# Altium PCB Nucleo_Dory_QFN68.PcbDoc (part 1 of 3)
Units mm, origin at the board's own origin, x right, y up, seen from the top; angles counter-clockwise.
Board outline 70.13 x 64.58 mm, 4 copper layers (L1, L2, L3, L4), stack 1.565 mm thick; 212 components, 161 nets, 1280 pads, 261 vias.
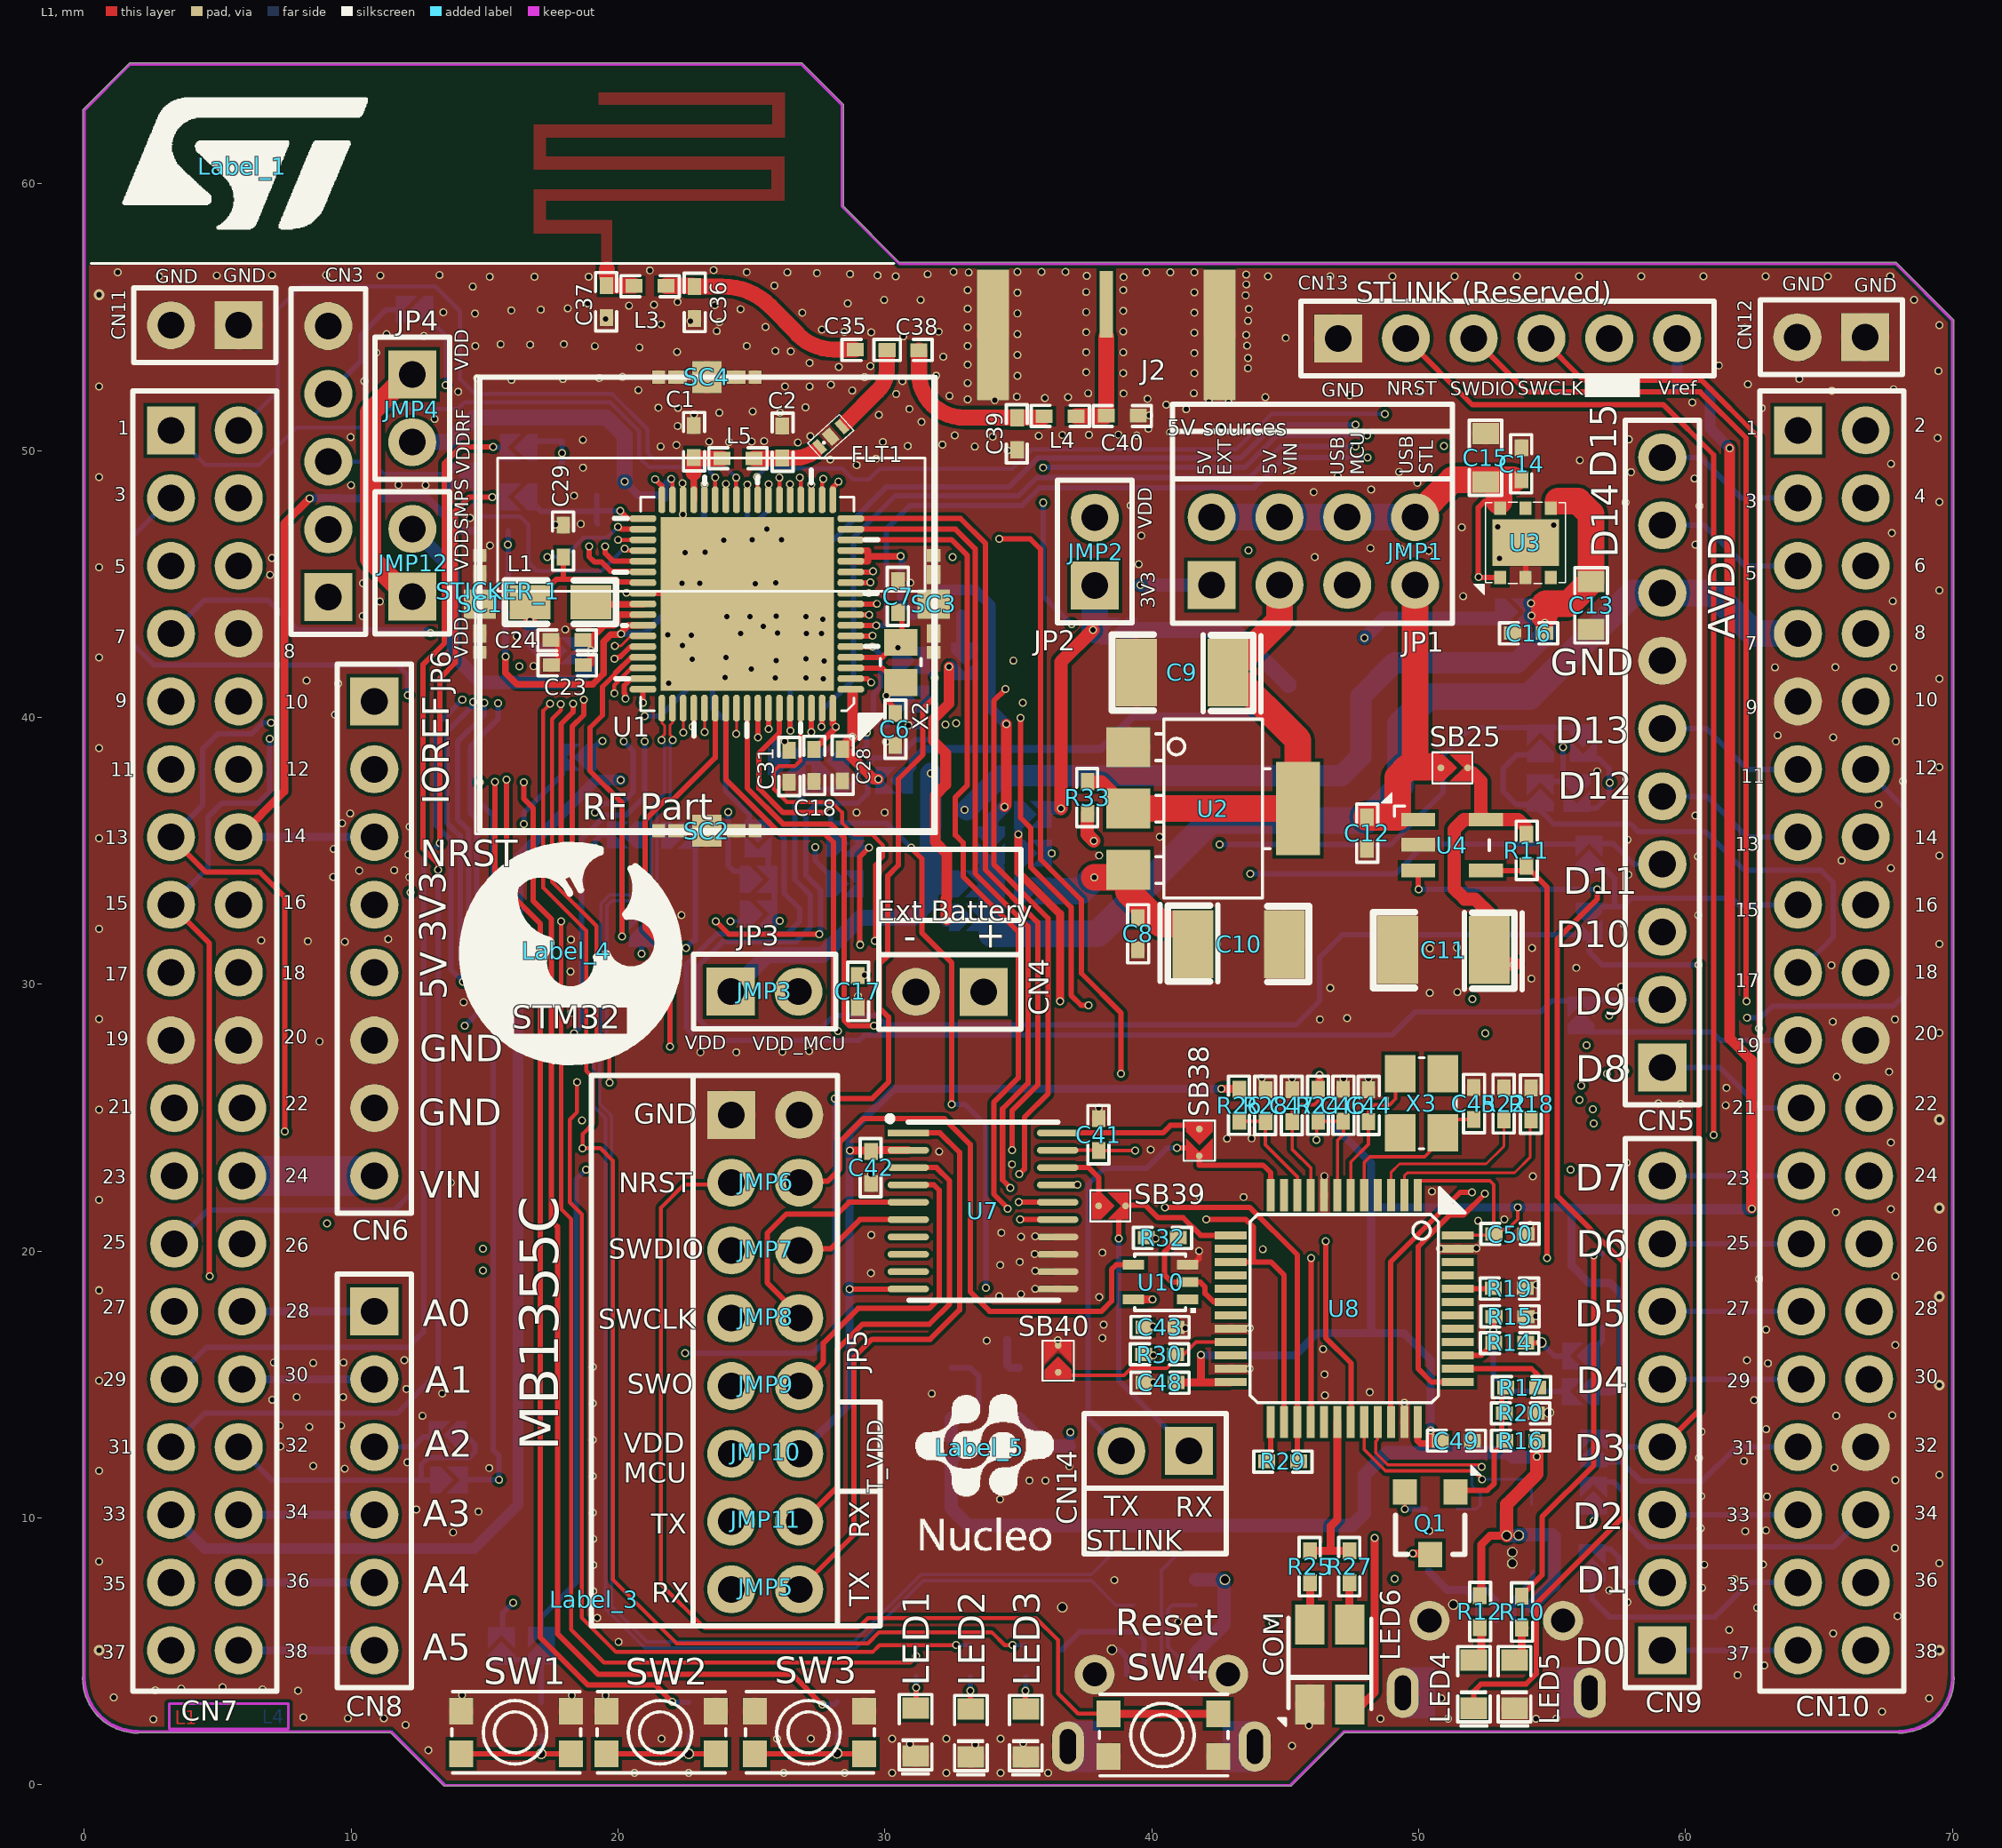
[diagram p0: L1 view]
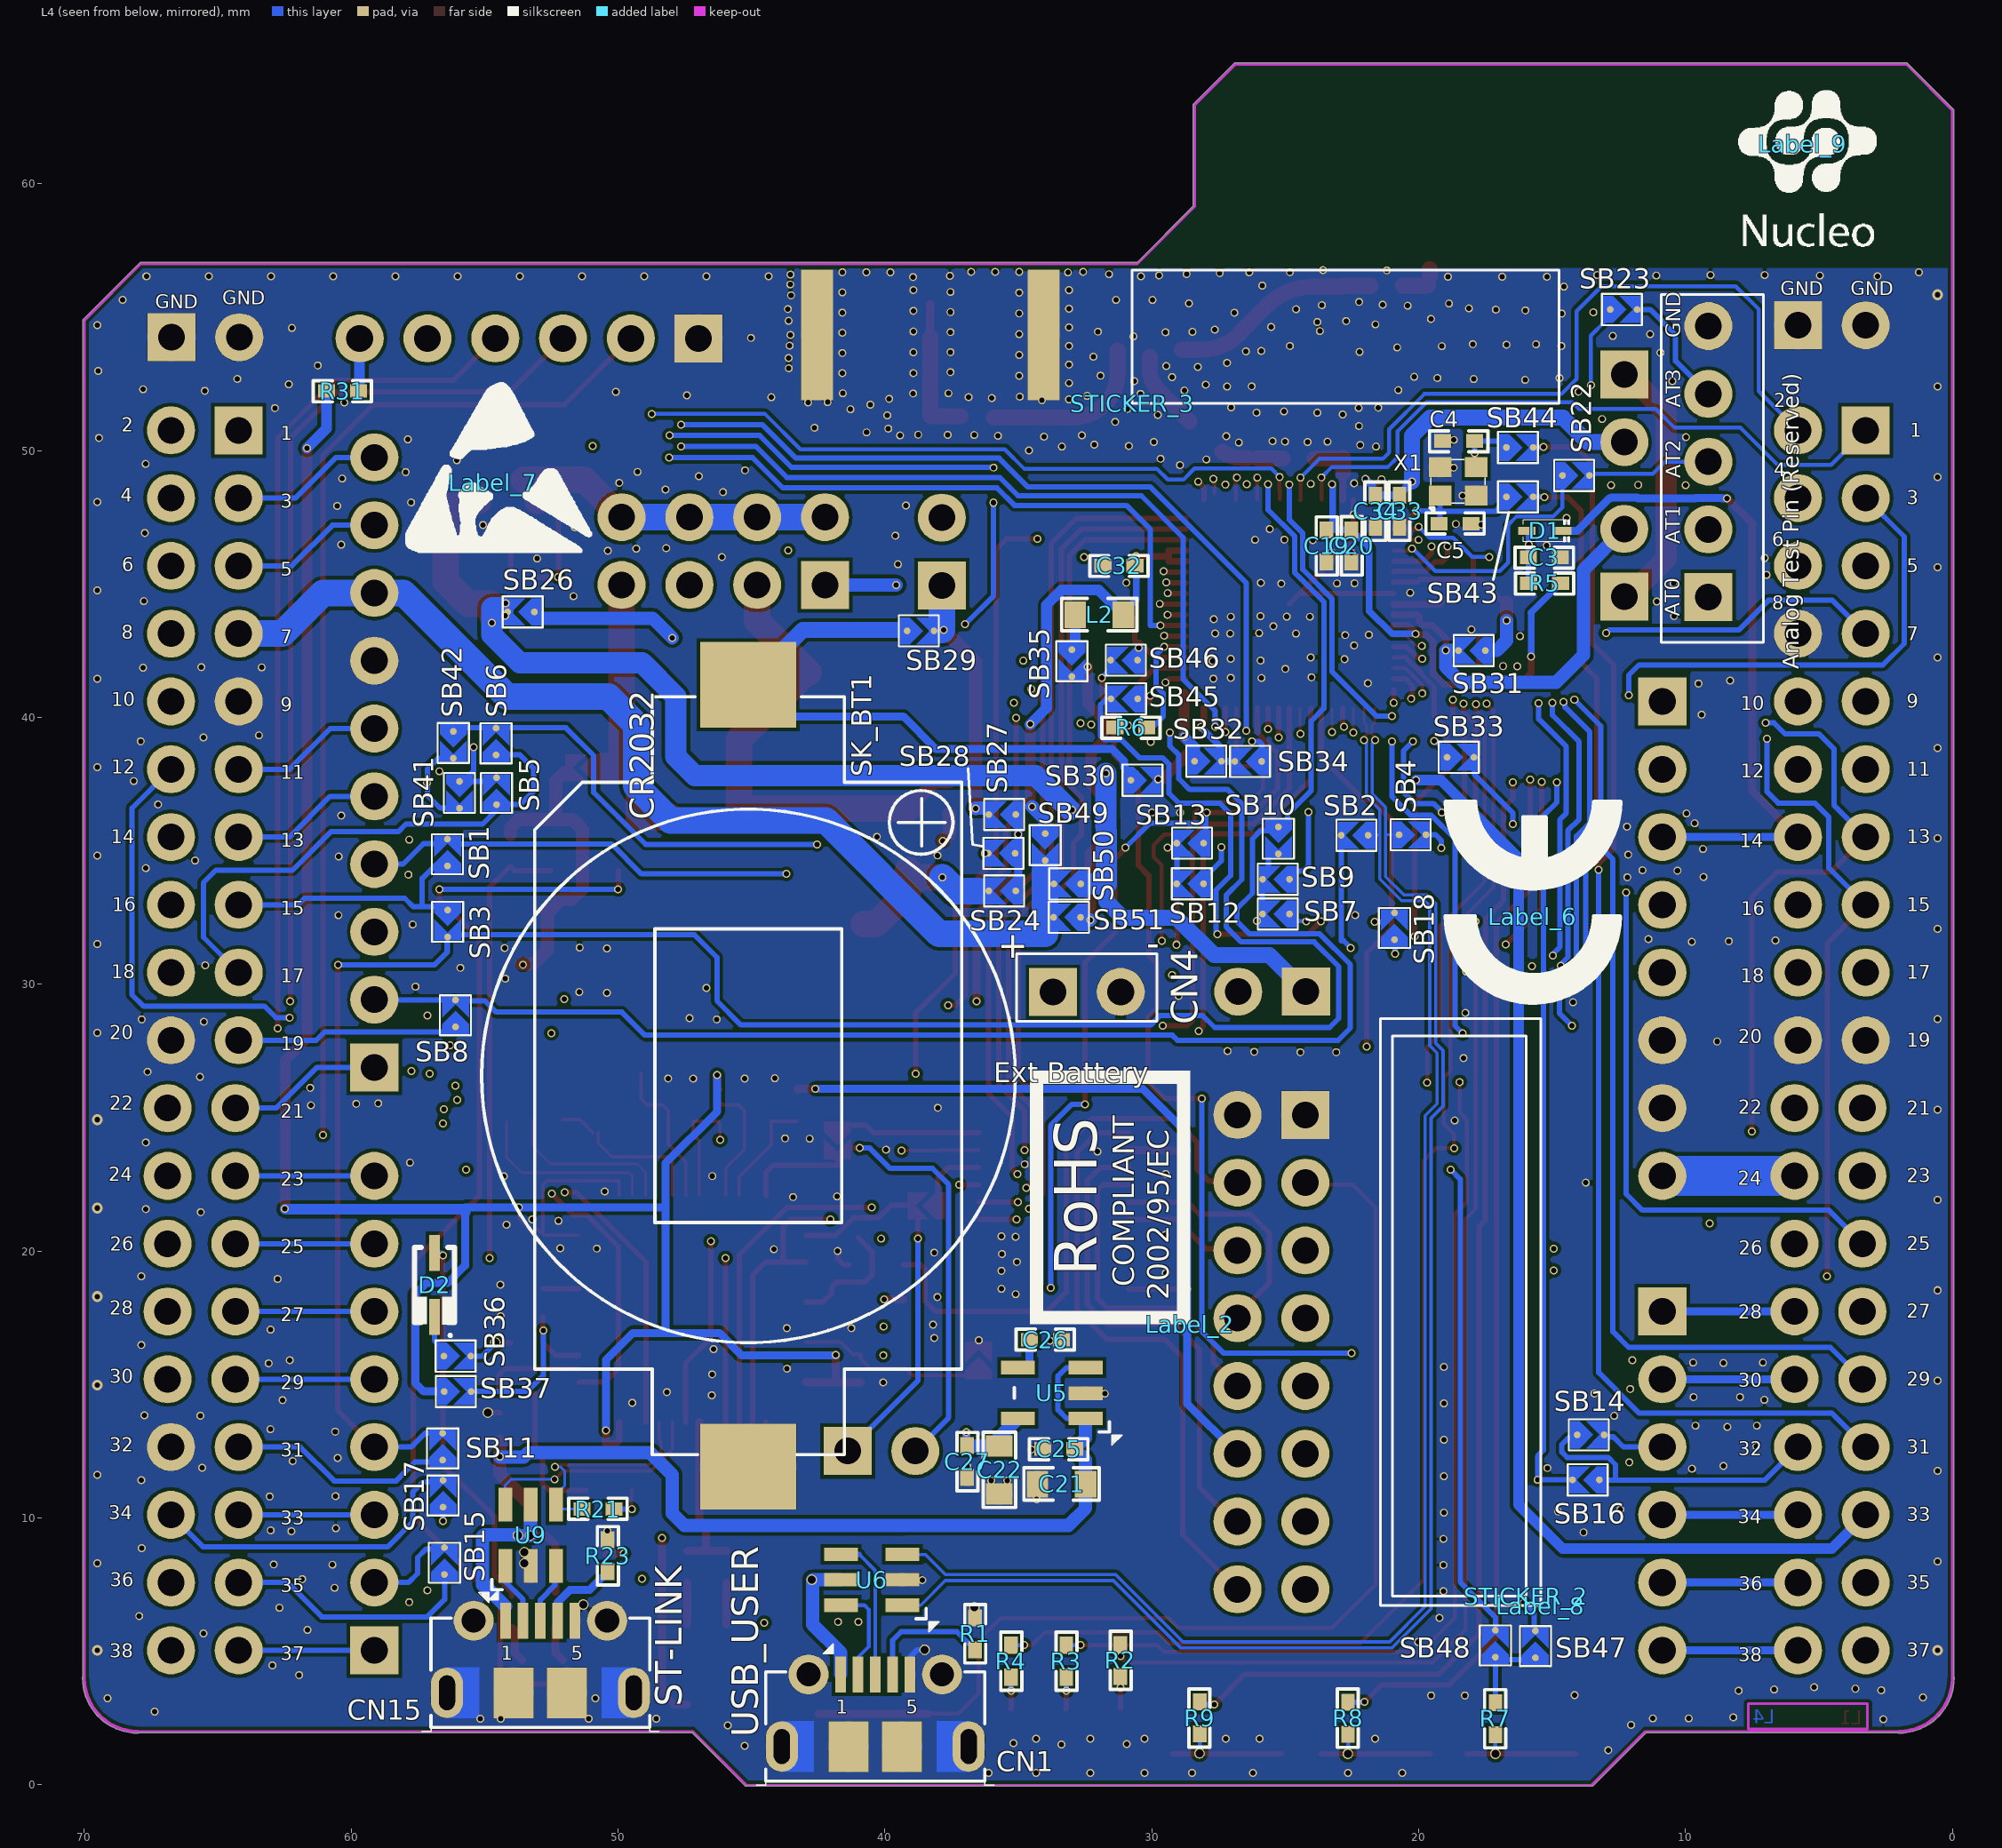
[diagram p1: L4 view, seen from below]
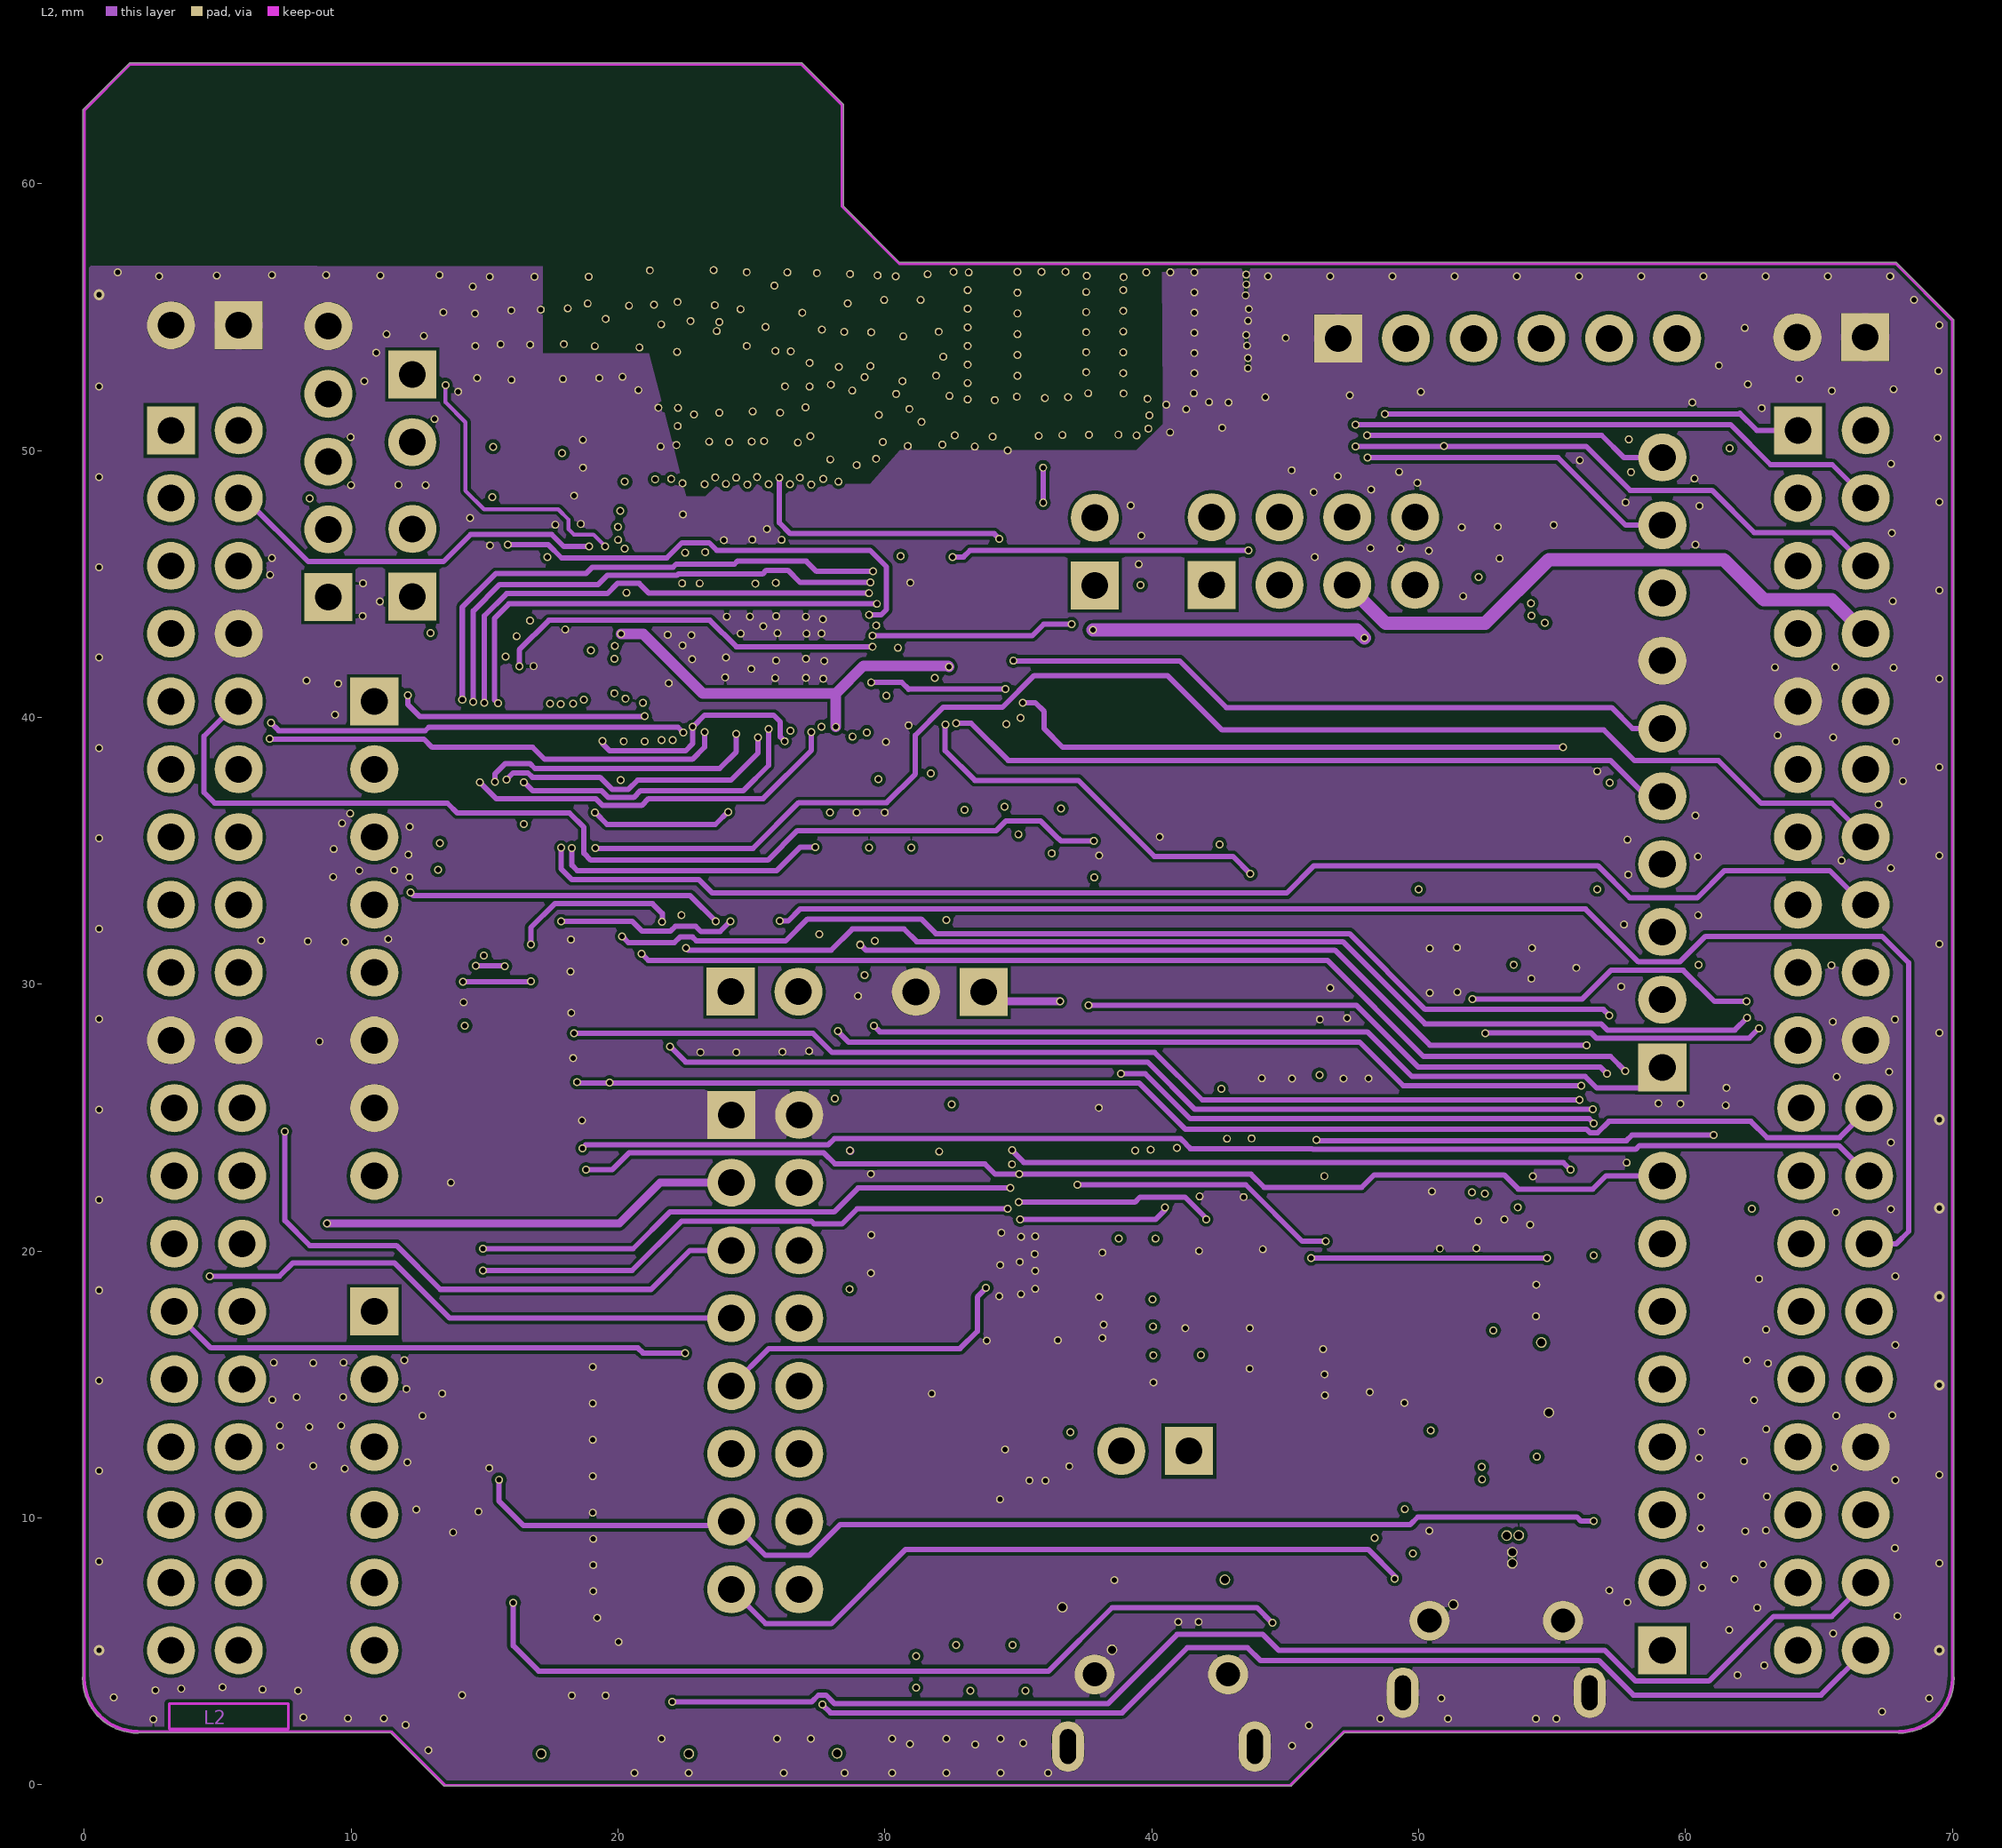
[diagram p2: L2]
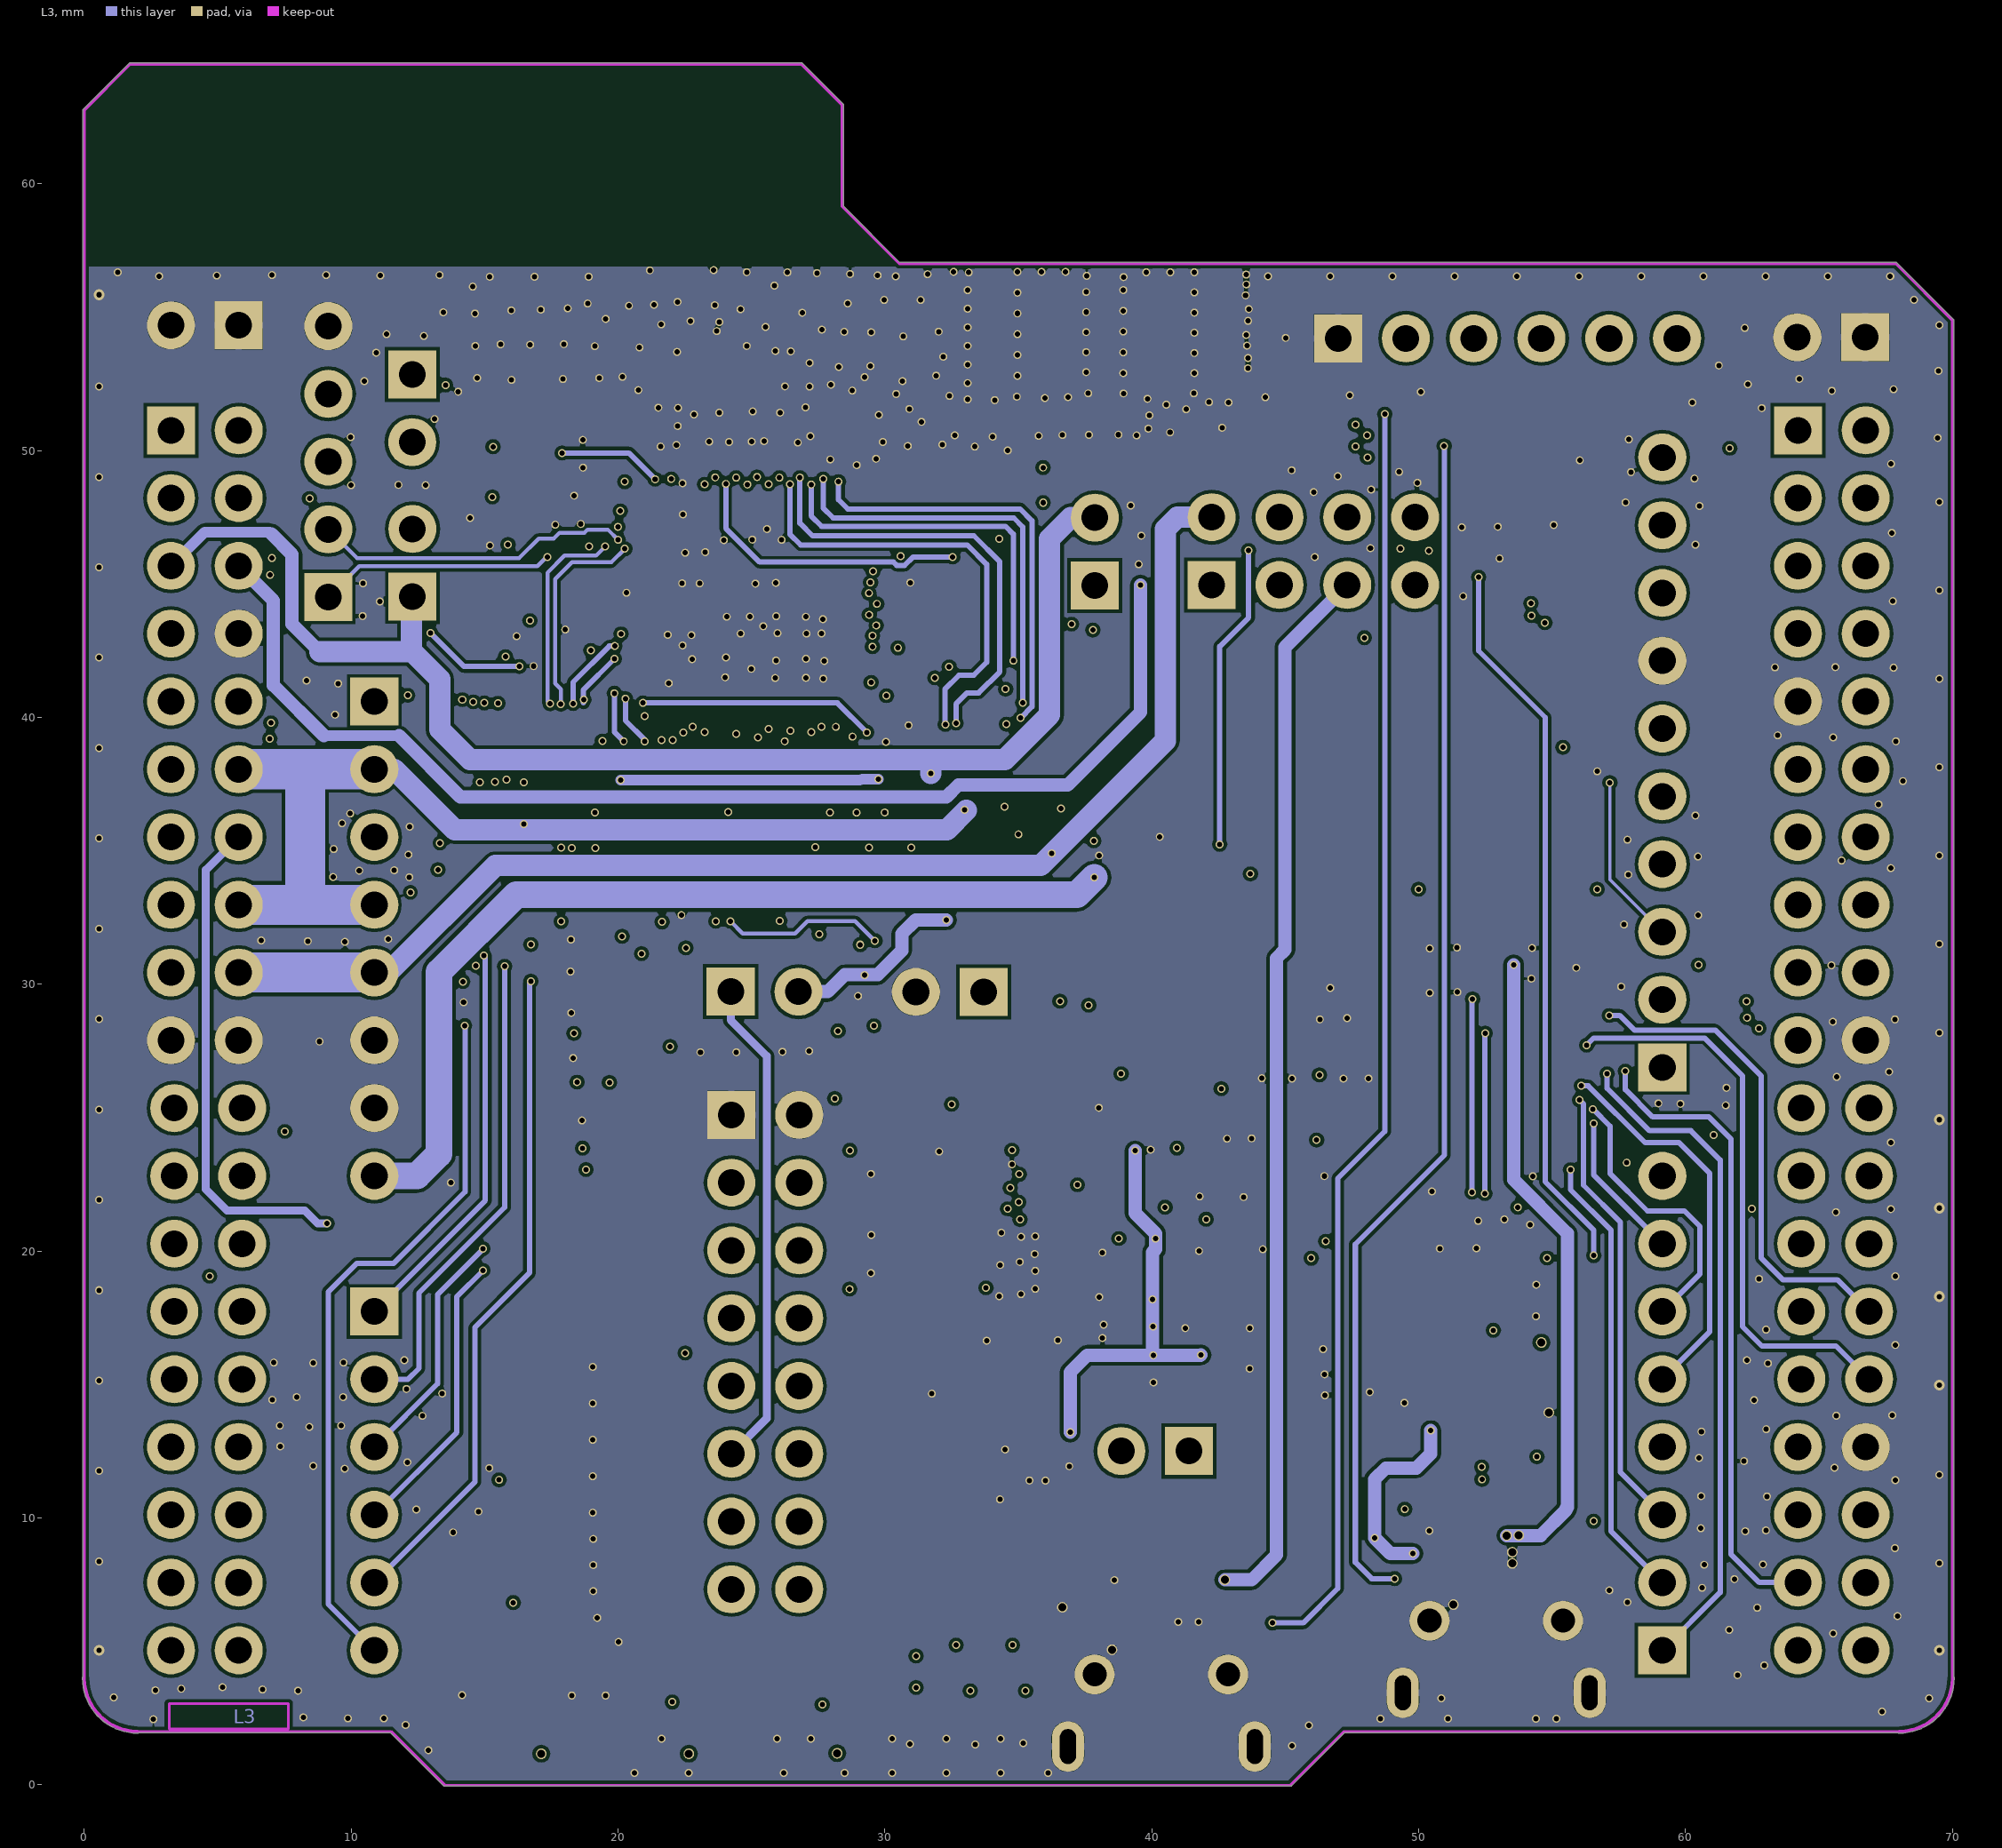
[diagram p3: L3]

## Layer stack, top to bottom
Top Solder: solder mask 0.0178, Solder Resist, Dk 4
L1: signal copper 0.0406
Dielectric1: core 0.4572, FR-4, Dk 4.2
L2: signal copper 0.0305
Dielectric 3: prepreg 0.508, Dk 4.4
L3: signal copper 0.0305
Dielectric 2: core 0.4572, FR-4, Dk 4.2
L4: signal copper 0.0406
Bottom Solder: solder mask 0.0178, Solder Resist, Dk 4

## Board outline
2,1.936 ccw(c2,2) 2.039,1.95 11.479,1.95 13.464,-0.036 13.464,-0.035 ccw(c13.5,0) 13.5,-0.05 45.2,-0.05 ccw(c45.2,0) 45.236,-0.035 45.236,-0.036 47.221,1.95 67.961,1.95 ccw(c68,2) 68,1.936 ccw(c68,4) 70.064,4 ccw(c70,4) 70.05,4.039 70.05,54.876 ccw(c70,54.876) 70.035,54.912 70.036,54.912 67.912,57.036 67.912,57.035 ccw(c67.876,57) 67.876,57.05 30.559,57.05 28.446,59.163 28.446,62.952 ccw(c28.396,62.952) 28.431,62.988 28.432,62.988 26.908,64.512 26.908,64.511 ccw(c26.872,64.476) 26.872,64.526 1.726,64.526 ccw(c1.726,64.476) 1.69,64.511 1.69,64.512 -0.036,62.786 -0.035,62.786 ccw(c0,62.75) -0.05,62.75 -0.05,4.039 ccw(c0,4) -0.064,4 ccw(c2,4)

## Design rules (kind name [scope] priority, off if disabled: settings)
AssemblyTestPointUsage [All] p1 off:
AssemblyTestpoint [All] p1 off: testpointundercomponent=TRUE minsize=1.016 maxsize=2.54 preferedsize=1.524 minholesize=0 maxholesize=1.016 preferedholesize=0.813 testpointgrid=0.025 usegrid=TRUE gridtolerance=0 allowsidetop=TRUE allowsidebottom=TRUE
Clearance 0.126 [All] p1: gap=0.1 ignorepadtopadclearanceinfootprint=FALSE except(0: Arc-Hole Track-Hole SMDPad-Hole THPad-Hole Via-Hole Fill-Hole Poly-Hole Region-Hole Text-Hole; 0.126: Arc-Poly Track-Poly SMDPad-Poly THPad-Poly Via-Poly)
ComponentClearance [All] p1 off: gap=0.254 collisioncheckmode=3 verticalgap=0.254 showdistances=FALSE
DiffPairsRouting [All] p1: maxlimit=0.1 minlimit=0.1 mostfreqgap=0.1 toplayer_minwidth=0.12 toplayer_maxwidth=0.12 toplayer_prefwidth=0.12 midlayer1_minwidth=0.12 midlayer1_maxwidth=0.12 midlayer1_prefwidth=0.12 midlayer4_minwidth=0.12 midlayer4_maxwidth=0.12 midlayer4_prefwidth=0.12 bottomlayer_minwidth=0.12 bottomlayer_maxwidth=0.12 bottomlayer_prefwidth=0.12 maxuncoupledlength=12.7
FabricationTestPointUsage TestPointUsage [All] p1 off: valid=0 allowmultiple=FALSE
FabricationTestpoint Testpoint [(IsPad And (OnTopLayer Or OnBottomLayer))] p1 off: side=3 testpointundercomponent=TRUE minsize=1.016 maxsize=2.54 preferedsize=1.524 minholesize=0 maxholesize=1.016 preferedholesize=0.813 testpointgrid=0.025 allowsidetop=TRUE allowsidebottom=TRUE usegrid=TRUE gridtolerance=0
FanoutControl Fanout_BGA [IsBGA] p1 off: bgadir=Out bgaviamode=Centered fanoutstyle=Auto fanoutdirection=Alternating viagrid=0.025 // Fanout_BGA (Default Rule)
FanoutControl Fanout_LCC [IsLCC] p2 off: bgadir=Out bgaviamode=Centered fanoutstyle=Auto fanoutdirection=Alternating viagrid=0.025 // Fanout_LCC (Default Rule)
FanoutControl Fanout_SOIC [IsSOIC] p3 off: bgadir=Out bgaviamode=Centered fanoutstyle=Auto fanoutdirection=Alternating viagrid=0.025 // Fanout_SOIC (Default Rule)
FanoutControl Fanout_Small [(CompPinCount < 5)] p4 off: bgadir=Out bgaviamode=Centered fanoutstyle=Auto fanoutdirection=OutThenIn viagrid=0.025 // Fanout_Small (Default Rule)
FanoutControl Fanout_Default [All] p5 off: bgadir=Out bgaviamode=Centered fanoutstyle=Auto fanoutdirection=Alternating viagrid=0.025 // Fanout_Default (Default Rule)
Height [All] p1 off: minheight=0 maxheight=25.4 prefheight=12.7
HoleSize [All] p1 off: absolutevalues=TRUE maxlimit=3.81 minlimit=0.1 maxpercent=80.000 minpercent=20.000
HoleToHoleClearance [All] p1 off: gap=0.254 allowstackedmicrovias=TRUE
LayerPairs [All] p1 off: enforce=FALSE
MinimumSolderMaskSliver [All] p1 off: minsoldermaskwidth=0.254
NetAntennae [All] p1 off: netantennaetolerance=0
PlaneClearance [All] p1 off: clearance=0.508
PlaneConnect [All] p1: planeconnectstyle=Direct reliefexpansion=0.508 reliefentries=4 reliefconductorwidth=0.254 reliefairgap=0.254
PolygonConnect [IsVia] p1: connectstyle=Direct reliefconductorwidth=0.508 reliefentries=4 polygonreliefangle="90 Angle" airgapwidth=0.254
RoutingCorners [All] p1 off: cornerstyle=45-Degree minsetback=2.54 maxsetback=2.54
RoutingLayers [All] p1 off: top layer_v5=TRUE mid layer 1_v5=TRUE mid layer 4_v5=TRUE bottom layer_v5=TRUE
RoutingPriority [All] p1 off: routingpriority=0
RoutingTopology [All] p1 off: topology=Shortest
RoutingVias [All] p1: holewidth=0.3 width=0.4 viastyle="Through Hole" minholewidth=0.1 minwidth=0.2 maxholewidth=3.6 maxwidth=6
SilkToBoardRegionClearance [All] p1 off:
SilkToSilkClearance [All] p1 off: silktosilkclearance=0.254
SilkToSolderMaskClearance SilkscreenOverComponentPads [IsPad] p1 off: minsilkscreentomaskgap=0.254 clearancetoexposedcopper=TRUE
SolderMaskExpansion [All] p1: expansion=0.102
Width [All] p1: maxlimit=6 minlimit=0.075 preferedwidth=0.2 midlayer4_minwidth=0.1 bottomlayer_minwidth=0.1 minimp=50.000000 maximp=50.000000 favimp=50.000000
4 further rules are at their usual default settings.

## Classes and differential pairs
component class MCU: C3 C4 C5 C6 C7 CN3 D1 LED1 LED2 LED3 R2 R3 R4 R5 R6 R7 R8 R9 SB22 SB23 SB43 SB44 SB45 SB46 SB47 SB48 SW1 SW2 SW3 SW4 X1 X2
net class DIFF90: USB_N USB_P USBSTLK_N USBSTLK_P
component class ST_LINK_V2-1: C41 C42 C43 C44 C45 C46 C47 C48 C49 C50 CN13 CN14 CN15 D2 JMP5 JMP6 JMP7 JMP8 JMP9 JMP10 JMP11 JP5 LD1 LED6 Q1 R14 R15 R16 R17 R18 R19 R20 R21 R22 R23 R24 R25 R26 R27 R28 R29 R30 R31 R32 SB36 SB37 SB38 SB39 SB40 U7 U8 U9 U10 X3
component class RF: C1 C2 C33 C34 C35 C36 C37 C38 C39 C40 FLT1 J2 J? JMP4 JP4 L3 L4 L5 SC1 SC2 SC3 SC4 SH1 U1
component class Power_managment: C8 C9 C10 C11 C12 C13 C14 C15 C16 C17 C18 C19 C20 C21 C22 C23 C24 C25 C26 C27 C28 C29 C31 C32 CN4 CN11 CN12 JMP1 JMP2 JMP3 JMP12 JP1 JP2 JP3 JP6 L1 L2 LD3 LED4 LED5 R10 R11 R12 SB24 SB25 SB26 SB27 SB28 SB29 SB30 SB31 SB32 SB33 SB34 SB35 SB49 SB50 SB51 SK_BT1 T2 U2 U3 U4 U5
component class Extension_CN: CN1 CN5 CN6 CN7 CN8 CN9 CN10 R1 R33 SB1 SB2 SB3 SB4 SB5 SB6 SB7 SB8 SB9 SB10 SB11 SB12 SB13 SB14 SB15 SB16 SB17 SB18 SB41 SB42 U6
component class Project_Overview: Label_1 Label_2 Label_3 Label_4 Label_5 Label_6 Label_7 Label_8 Label_9 STICKER_1 STICKER_2 STICKER_3
differential pair USB: +USB_P -USB_N
differential pair USBSTLK: +USBSTLK_P -USBSTLK_N

## Components (designator, comment, footprint, x,y, rotation, side; value= is the part's Value field where it differs from the comment)
C1 "0.8pF" 0402_CAP_NPOL 22.836,50.335 r270 top
C2 "0.3pF" 0402_CAP_NPOL 26.156,50.315 r270 top
C3 "100nF" 0402_CAP_NPOL 15.294,45.998 r0 bottom
C4 "TBD" 0402_CAP_NPOL 18.499,50.361 r0 bottom
C5 "TBD" 0402_CAP_NPOL 18.637,47.259 r180 bottom
C6 "10pF" 0402_CAP_NPOL 30.387,39.556 r270 top
C7 "10pF" 0402_CAP_NPOL 30.496,44.535 r90 top
C8 "100nF/25V" 0402_CAP_NPOL 39.48,31.894 r270 top
C9 "10uF/25V" 1210_CAP_POL 41.142,41.684 r180 top
C10 "10uF/25V" 1210_CAP_POL 43.26,31.504 r0 top
C11 "4.7uF/10V" 1210_CAP_POL 50.93,31.284 r180 top
C12 "100nF" 0402_CAP_NPOL 48.057,35.664 r270 top
C13 "1uF/X5R" 0603_CAP_NPOL 56.46,44.198 r270 top
C14 "100nF" 0402_CAP_NPOL 53.852,49.505 r90 top
C15 "1uF/X5R" 0603_CAP_NPOL 52.507,49.731 r90 top
C16 "100nF" 0402_CAP_NPOL 54.119,43.161 r180 top
C17 "100nF" 0402_CAP_NPOL 28.985,29.732 r270 top
C18 "100nF" 0402_CAP_NPOL 27.344,38.203 r270 top
C19 "100nF" 0402_CAP_NPOL 23.455,46.427 r270 bottom
C20 "100nF" 0402_CAP_NPOL 22.521,46.429 r270 bottom
C21 "1uF/X5R" 0603_CAP_NPOL 33.38,11.274 r0 bottom
C22 "1uF/X5R" 0603_CAP_NPOL 35.71,11.804 r270 bottom
C23 "4.7uF" 0402_CAP_NPOL 18.1,41.964 r180 top
C24 "100nF" 0402_CAP_NPOL 18.091,42.902 r180 top
C25 "100nF" 0402_CAP_NPOL 33.49,12.594 r0 bottom
C26 "100nF" 0402_CAP_NPOL 33.99,16.674 r180 bottom
C27 "100nF" 0402_CAP_NPOL 36.92,12.114 r270 bottom
C28 "100nF" 0402_CAP_NPOL 28.41,38.212 r270 top
C29 "4.7uF" 0402_CAP_NPOL 17.951,46.609 r90 top
C31 "100nF" 0402_CAP_NPOL 26.409,38.163 r270 top
C32 "100nF" 0402_CAP_NPOL 31.23,45.689 r0 bottom
C33 "100nF" 0402_CAP_NPOL 20.715,47.726 r90 bottom
C34 "100pF" 0402_CAP_NPOL 21.612,47.726 r90 bottom
C35 "10nF" 0402_CAP_NPOL 29.488,53.783 r180 top
C36 "" 0402_CAP_NPOL 22.863,55.551 r270 top
C37 "1.2pF" 0402_CAP_NPOL 19.566,55.578 r90 top
C38 "" 0402_CAP_NPOL 30.679,53.759 r0 top
C39 "" 0402_CAP_NPOL 34.957,50.63 r90 top
C40 "" 0402_CAP_NPOL 38.895,51.31 r180 top
C41 "100nF" 0402_CAP_NPOL 38.011,24.365 r90 top
C42 "100nF" 0402_CAP_NPOL 29.478,23.131 r90 top
C43 "100nF" 0402_CAP_NPOL 40.31,17.146 r0 top
C44 "20pF" 0402_CAP_NPOL 48.12,25.456 r270 top
C45 "20pF" 0402_CAP_NPOL 52.064,25.532 r270 top
C46 "100nF" 0402_CAP_NPOL 47.17,25.466 r270 top
C47 "100nF" 0402_CAP_NPOL 45.26,25.456 r90 top
C48 "100nF" 0402_CAP_NPOL 40.31,15.076 r180 top
C49 "100nF" 0402_CAP_NPOL 51.414,12.886 r0 top
C50 "100nF" 0402_CAP_NPOL 53.42,20.636 r0 top
CN1 "1050170001" USBMICROB_MOLEX_105017-0001_H2P90 40.359,-0.015 r180 bottom
CN3 "HEADER_1X5" "Header NF 1x5x2.54 TH" 9.146,44.507 r90 top
CN4 "HEADER_1X2" "Header NF 1x2x2.54 TH" 33.703,29.714 r180 top
CN5 "HEADER_1X10" "Header F 1x10x2.54 TH V" 59.13,26.884 r90 top locked
CN6 "HEADER_1X8_F" "Header F 1x8x2.54 TH V" 10.87,40.6 r270 top locked (schematic designator CN8)
CN7 "HEADER_2X19_M" "Header M 2x19x2.54 TH M_top + M_bottom" 3.25,50.76 r270 top locked (schematic designator CN9)
CN8 "HEADER_1X6" "Header F 1x6x2.54 TH V" 10.87,17.74 r270 top locked (schematic designator CN14)
CN9 "HEADER_1X8_F" "Header F 1x8x2.54 TH V" 59.13,5.04 r90 top locked (schematic designator CN11)
CN10 "HEADER_2X19_M" "Header M 2x19x2.54 TH M_top + M_bottom" 64.21,50.76 r270 top locked
CN11 "HEADER_1X2" "Header M 1x2x2.54 TH V" 5.79,54.697 r180 top
CN12 "HEADER_1X2" "Header M 1x2x2.54 TH V" 66.73,54.244 r180 top
CN13 "HEADER_1X6" "Header NF 1x6x2.54 TH" 46.98,54.204 r0 top
CN14 "HEADER_1X2" "Header NF 1x2x2.54 TH" 41.398,12.509 r180 top
CN15 "1050170001" USBMICROB_MOLEX_105017-0001_H2P90 52.907,2 r180 bottom
D1 "BAT54KFILM" SOD523 15.27,46.998 r180 bottom
D2 "BAT60JFILM" SOD-323 56.87,18.734 r270 bottom
FLT1 "LFB182G45CGFD436" LFB182G45CGFD436 27.968,50.52 r42 top
J2 "SMA" SMA_T_9.52_NF 38.298,57.894 r90 top
JMP1 "Jumper 2.54mm" "Jumper 2.54mm BLACK" 49.871,46.225 r270 top
JMP2 "Jumper 2.54mm" "Jumper 2.54mm BLACK" 37.897,46.196 r90 top
JMP3 "Jumper 2.54mm" "Jumper 2.54mm BLACK" 25.482,29.761 r0 top
JMP4 "Jumper 2.54mm" "Jumper 2.54mm BLACK" 12.269,51.546 r270 top
JMP5 "Jumper 2.54mm" "Jumper 2.54mm BLACK" 25.538,7.412 r180 top
JMP6 "Jumper 2.54mm" "Jumper 2.54mm BLACK" 25.538,22.599 r180 top
JMP7 "Jumper 2.54mm" "Jumper 2.54mm BLACK" 25.538,20.068 r180 top
JMP8 "Jumper 2.54mm" "Jumper 2.54mm BLACK" 25.538,17.537 r180 top
JMP9 "Jumper 2.54mm" "Jumper 2.54mm BLACK" 25.538,15.005 r180 top
JMP10 "Jumper 2.54mm" "Jumper 2.54mm BLACK" 25.538,12.474 r180 top
JMP11 "Jumper 2.54mm" "Jumper 2.54mm BLACK" 25.538,9.943 r180 top
JMP12 "Jumper 2.54mm" "Jumper 2.54mm BLACK" 12.339,45.779 r90 top
JP1 "HEADER_2X4" "Header M 2x4x2.54 TH V" 42.245,44.965 r0 top
JP2 "HEADER_1X2" "Header M 1x2x2.54 TH V" 37.867,44.946 r90 top
JP3 "HEADER_1X2" "Header M 1x2x2.54 TH V" 24.222,29.723 r0 top
JP4 "HEADER_1X2" "Header M 1x2x2.54 TH V" 12.289,52.856 r270 top
JP5 "HEADER_2X8" "Header M 2x8x2.54 TH V" 24.247,25.107 r270 top
JP6 "HEADER_1X2" "Header M 1x2x2.54 TH V" 12.296,44.523 r90 top
L1 "10uH" 0805_COIL 16.702,44.318 r0 top
L2 "FCM1608KF-601T03" 0603_COIL 31.965,43.852 r180 bottom
L3 "3.6nH" 0402_COIL 21.201,56.173 r180 top
L4 "0R" 0402_COIL 36.57,51.289 r0 top
L5 "2.7nH" 0402_COIL 24.495,49.703 r0 top
Label_1 "LOGO_ST" LOGO_ST_Size3 5.925,60.67 r0 top
Label_2 "LOGO_ROHS" SYMBOL_RoHS 28.564,17.265 r90 bottom
Label_3 "LOGO_Nucleo_www" LOGO_Nucleo_www 19.111,6.957 r90 top
Label_4 "LOGO_STM32" LOGO_STM32 18.074,31.267 r0 top
Label_5 "LOGO_Nucleo" LOGO_Nucleo 33.559,12.655 r0 top
Label_6 "LOGO_CE" "LOGO CE" 15.724,32.546 r90 bottom
Label_7 "LOGO_ESD" "LOGO ESD" 54.689,48.818 r180 bottom
Label_8 "LOGO_StickerArea_W21x6" LOGO_StickerArea_Border 15.425,6.72 r90 bottom
Label_9 "LOGO_Nucleo" LOGO_Nucleo 5.609,61.504 r180 bottom
LED1 "LED BLUE" 0603_LED_Blue 31.15,1.974 r90 top
LED2 "LED GREEN" 0603_LED_GREEN 33.22,1.944 r90 top
LED3 "LED RED" 0603_LED_RED 35.28,1.944 r90 top
LED4 "LED RED" 0603_LED_RED 52.069,3.77 r90 top
LED5 "LED RED" 0603_LED_RED 53.593,3.77 r90 top
LED6 "HSMF-A201-A00J1/KAA-3528SURKCGKC" HSMF-A201 46.67,4.514 r90 top
Q1 "2N2222" SOT23-3 50.432,8.629 r180 top
R1 "100K" 0402_RES 36.627,5.66 r270 bottom
R2 "680" 0402_RES 31.175,4.664 r270 bottom
R3 "680" 0402_RES 33.205,4.634 r270 bottom
R4 "680" 0402_RES 35.275,4.634 r270 bottom
R5 "100K (not fitted)" 0402_RES 15.282,45.028 r0 bottom
R6 "10K" 0402_RES 30.781,39.629 r0 bottom
R7 "1K" 0402_RES 17.124,2.478 r90 bottom
R8 "1K" 0402_RES 22.646,2.496 r90 bottom
R9 "1K" 0402_RES 28.203,2.504 r90 bottom
R10 "1K" 0402_RES 53.863,6.476 r270 top
R11 "10K" 0402_RES 54.034,35.021 r270 top
R12 "1K" 0402_RES 52.29,6.495 r270 top
R14 "2K7" 0402_RES 53.41,16.566 r180 top
R15 "4K7" 0402_RES 53.42,17.546 r0 top
R16 "10K" 0402_RES 53.826,12.886 r0 top
R17 "100" 0402_RES 53.856,14.889 r0 top
R18 "10K" 0402_RES 54.214,25.512 r90 top
R19 "100K" 0402_RES 53.4,18.606 r180 top
R20 "36K" 0402_RES 53.816,13.933 r180 top
R21 "1K5" 0402_RES 50.75,10.334 r180 bottom
R22 "10K" 0402_RES 53.194,25.522 r90 top
R23 "100K" 0402_RES 50.39,8.584 r270 bottom
R24 "100K" 0402_RES 46.24,25.466 r90 top
R25 "100/2K7" 0402_RES 45.93,8.174 r90 top
R26 "4K7" 0402_RES 43.28,25.466 r90 top
R27 "100/100" 0402_RES 47.41,8.174 r90 top
R28 "4K7" 0402_RES 44.26,25.456 r90 top
R29 "100" 0402_RES 44.91,12.126 r180 top
R30 "" 0402_RES 40.29,16.126 r0 top
R31 "10" 0402_RES 60.326,52.233 r0 bottom
R32 "100K" 0402_RES 40.4,20.506 r180 top
R33 "1K" 0402_RES 37.593,36.995 r90 top
SB1 "Close" SB-tiny 56.39,34.934 r90 bottom
SB2 "Open" SB-tiny 22.394,35.586 r0 bottom
SB3 "Open" SB-tiny 56.381,32.281 r270 bottom
SB4 "Open" SB-tiny 20.234,35.604 r180 bottom
SB5 "Close" SB-tiny 54.55,37.234 r90 bottom
SB6 "Open" SB-tiny 54.57,39.094 r90 bottom
SB7 "Open" SB-tiny 25.34,32.633 r0 bottom
SB8 "Close" SB-tiny 56.09,28.904 r90 bottom
SB9 "Close" SB-tiny 25.34,33.937 r0 bottom
SB10 "Open" SB-tiny 25.256,35.395 r270 bottom
SB11 "Close" SB-tiny 56.571,12.669 r90 bottom
SB12 "Close" SB-tiny 28.561,33.767 r0 bottom
SB13 "Open" SB-tiny 28.558,35.288 r0 bottom
SB14 "Close" SB-tiny 13.559,13.115 r180 bottom
SB15 "Close" SB-tiny 56.504,8.384 r90 bottom
SB16 "Open" SB-tiny 13.731,11.429 r0 bottom
SB17 "Close" SB-tiny 56.556,10.905 r90 bottom
SB18 "Open" SB-tiny 20.905,32.171 r90 bottom
SB22 "Open" SB-tiny 14.11,49.069 r180 bottom
SB23 "Open" SB-tiny 12.321,55.287 r180 bottom
SB24 "Open" SB-tiny 35.597,33.5 r0 bottom
SB25 "Open" SB-tiny 51.331,38.11 r0 top
SB26 "Close" SB-tiny 53.631,43.954 r0 bottom
SB27 "Open" SB-tiny 35.597,36.361 r0 bottom
SB28 "Open" SB-tiny 35.619,34.908 r0 bottom
SB29 "Open" SB-tiny 38.668,43.245 r180 bottom
SB30 "Open" SB-tiny 30.284,37.648 r180 bottom
SB31 "Open" SB-tiny 18.002,42.506 r0 bottom
SB32 "Close" SB-tiny 27.896,38.358 r180 bottom
SB33 "Close" SB-tiny 18.435,38.505 r180 bottom
SB34 "Open" SB-tiny 26.384,38.352 r0 bottom
SB35 "Close" SB-tiny 32.994,42.039 r270 bottom
SB36 "Close" SB-tiny 56.023,16.067 r180 bottom
SB37 "Open" SB-tiny 56.011,14.739 r180 bottom
SB38 "Close" SB-tiny 41.78,24.076 r270 top
SB39 "Close" SB-tiny 38.51,21.696 r0 top
SB40 "Open" SB-tiny 36.493,15.96 r90 top
SB41 "Close" SB-tiny 55.94,37.104 r270 bottom
SB42 "Open" SB-tiny 56.17,38.976 r270 bottom
SB43 "Open" SB-tiny 16.214,48.268 r180 bottom
SB44 "Open" SB-tiny 16.214,50.119 r180 bottom
SB45 "Open" SB-tiny 31.025,40.698 r0 bottom
SB46 "Open" SB-tiny 31.035,42.147 r0 bottom
SB47 "Close" SB-tiny 15.625,5.262 r90 bottom
SB48 "Open" SB-tiny 17.124,5.285 r90 bottom
SB49 "Open" SB-tiny 33.994,35.149 r270 bottom
SB50 "Close" SB-tiny 33.16,33.761 r0 bottom
SB51 "Open" SB-tiny 33.17,32.509 r0 bottom
SC1 "Shield Clip_A 3.9x1.1x1.28" "Shield Clip_A 3.9x1.1x1.28" 14.829,44.252 r90 top locked
SC2 "Shield Clip_A 3.9x1.1x1.28" "Shield Clip_A 3.9x1.1x1.28" 23.329,35.752 r180 top
SC3 "Shield Clip_A 3.9x1.1x1.28" "Shield Clip_A 3.9x1.1x1.28" 31.829,44.252 r90 top
SC4 "Shield Clip_A 3.9x1.1x1.28" "Shield Clip_A 3.9x1.1x1.28" 23.329,52.752 r180 top locked
SH1 "Shield 17.2x17.2x3" "Shield 17.2x17.2x3" -3.147,7.035 r0 top
SK_BT1 "CR2032-SCK1B" CR2032-SCK1 45.12,26.574 r90 bottom locked
STICKER_1 "FCC_ID_Sticker_16x5" "Sticker_FCC_ID 16x5mm" 15.497,44.728 r0 top
STICKER_2 "Sticker_BrdRef_21x5" Sticker_BrdRef_21x5mm 15.978,7.065 r90 bottom
STICKER_3 "Sticker_CPN_FG 16x5" "Sticker_CPN_FG 16x5mm" 30.737,51.764 r180 bottom
SW1 "User PB" "SW-PB SMD KMR2" 16.18,1.967 r0 top
SW2 "User PB" "SW-PB SMD KMR2" 21.614,1.967 r0 top
SW3 "User PB" "SW-PB SMD KMR2" 27.177,1.967 r0 top
SW4 "Reset PB" "SW-PB SMD KMR2" 40.436,1.865 r0 top
U1 "STM32WBxx_QFN68" VFQFPN68_8x8x0.1_p0.4 24.844,44.252 r180 top
U2 "LD1117S50TR" SOT223_SC73_A 42.3,36.584 r270 top
U3 "LD39050PU33R" "DFN6 3x3mm" 54.006,46.549 r0 top
U4 "STMPS2141STR" SOT23-5 51.253,35.217 r0 top
U5 "LD3985M33R" SOT23-5 33.75,14.684 r0 bottom
U6 "USBLC6-2SC6" SOT23-6 39.341,6.734 r0 bottom
U7 "TXS0108EPW" TSSOP20 30.875,24.431 r0 top
U8 "STM32F103CBT6" LQFP48_7X7_P050 47.21,17.846 r180 top
U9 "USBLC6-2SC6" SOT23-6 54.22,8.204 r90 bottom
U10 "74LVC1G07" SOT353-1 41.27,18.186 r180 top
X1 "NX2016_32M" NX2016_4P 18.526,48.848 r180 bottom
X2 "NX2012_32K768" NX2012_2P 30.591,41.307 r90 top
X3 "X3225-8MHz" X3225 50.11,25.542 r270 top

## Footprints (in the part's own frame and the unit in brackets; to place one, negate y for a bottom-side part, rotate by r counter-clockwise, add the part's x,y. Pads: shape width x height; smd on the part's side, far side on the other; paste and mask are expansions set on the pad)
0402_CAP_NPOL [mil] "Capacitor FootPrint 0402"
  rect 25x20 smd: 1(-23.58,0) 2(23.58,0)
  silkscreen extent -43,-15 43,16, body extent -39,-14 41,14, height 32
0402_COIL [mil] "Coil FootPrint 0402"
  rect 25x20 smd: 1(-23.58,0) 2(23.58,0)
  silkscreen extent -43,-15 43,16, body extent -38,-11 39,13, height 16
0402_RES [mil] "Resistor FootPrint 0402"
  rect 25x20 smd: 1(-23.58,0) 2(23.58,0)
  silkscreen extent -43,-15 43,16, body extent -38,-11 39,13, height 16
0603_CAP_NPOL [mm] "Capacitor FootPrint 0603"
  rect 0.8x1 smd: 1(-0.902,0) 2(0.902,0)
  silkscreen extent -1.41,-0.61 1.41,0.61, body extent -1.28,-0.46 1.26,0.48, height 0.82
0603_COIL [mm] "Coil Footprint 0603"
  rect 0.8x1 smd: 1(-0.902,0) 2(0.902,0)
  silkscreen extent -1.41,-0.61 1.41,0.61, body extent -1.26,-0.48 1.26,0.48, height 0.4
0603_LED_Blue [mm] "Resistor Footprint 0603"
  rect 0.8x1 smd: A(0.902,0) K(-0.902,0)
  silkscreen extent -1.59,-0.61 1.41,0.61, body extent -1.26,-0.48 1.26,0.48, height 0.84
0603_LED_GREEN [mm] "Resistor Footprint 0603"
  rect 0.8x1 smd: A(0.902,0) K(-0.902,0)
  silkscreen extent -1.59,-0.61 1.41,0.61, body extent -1.26,-0.48 1.26,0.48, height 0.84
0603_LED_RED [mm] "Resistor Footprint 0603"
  rect 0.8x1 smd: A(0.902,0) K(-0.902,0)
  silkscreen extent -1.59,-0.61 1.41,0.61, body extent -1.26,-0.48 1.26,0.48, height 0.84
0805_COIL [mil] "Coil FootPrint 0805"
  rect 60x50 smd: 1(0,0) 2(90,0)
  silkscreen extent -37,-32 127,32, body extent -21,-25 113,25, height 16
1210_CAP_POL [mil] "Capacitor Polarized 1210"
  rect 60x100 smd: 1(-67.5,0) 2(67.5,0)
  silkscreen extent -116,-56 104,59, body extent -72,-57 73,58, height 80
CR2032-SCK1 [mm]
  rect 3.2x3.6 smd: 1(14.65,0) 2(-14.65,0)
  silkscreen extent -14.2,-10.01 14.2,9.99, body extent -16.1,-8 16.1,8, height 5.6
"DFN6 3x3mm" [mm] "DFN6 3x3mm heigh=0.8mm"
  rect 0.45x0.5 smd mask+0.02: 1(-0.95,-1.3) 2(0,-1.3) 3(0.95,-1.3) 4(0.95,1.3) 5(0,1.3) 6(-0.95,1.3)
  rect 2.5x1.75 smd mask+0.02: 7(0,0)
  silkscreen extent -1.93,-1.94 1.5,1.52, body extent -1.52,-1.52 1.52,1.52, height 0.9
"Header F 1x6x2.54 TH V" [mm] "1x6x2.54 Header TH V Female"
  rect 1.8x1.8 hole 1: 1(0,0)
  round 1.8 hole 1: 2(2.54,0) 3(5.08,0) 4(7.62,0) 5(10.16,0) 6(12.7,0)
  silkscreen extent -1.4,-1.4 14.1,1.4, body extent -1.42,-1.28 14.07,1.22, height 8.5
"Header F 1x8x2.54 TH V" [mm] "1x8x2.54 Header TH V Female"
  rect 1.8x1.8 hole 1: 1(0,0)
  round 1.8 hole 1: 2(2.54,0) 3(5.08,0) 4(7.62,0) 5(10.16,0) 6(12.7,0) 7(15.24,0) 8(17.78,0)
  silkscreen extent -1.4,-1.4 19.18,1.4, body extent -1.42,-1.35 19.15,1.15, height 8.5
"Header F 1x10x2.54 TH V" [mm] "1x10x2.54 Header TH V Female"
  rect 1.8x1.8 hole 1: 1(0,0)
  round 1.8 hole 1: 2(2.54,0) 3(5.08,0) 4(7.62,0) 5(10.16,0) 6(12.7,0) 7(15.24,0) 8(17.78,0) 9(20.32,0) 10(22.86,0)
  silkscreen extent -1.4,-1.4 24.26,1.4, body extent -1.42,-1.33 24.23,1.17, height 8.5
"Header M 1x2x2.54 TH V" [mm] "1x2x2.54 Header TH V Male"
  rect 1.8x1.8 hole 1: 1(0,0)
  round 1.8 hole 1: 2(2.54,0)
  silkscreen extent -1.4,-1.4 3.94,1.4, body extent -1.27,-1.27 3.81,1.27, height 8.55
"Header M 2x4x2.54 TH V" [mm] "2x4x2.54 Header TH V Male"
  rect 1.8x1.8 hole 1: 1(0,0)
  round 1.8 hole 1: 2(0,2.54) 3(2.54,0) 4(2.54,2.54) 5(5.08,0) 6(5.08,2.54) 7(7.62,0) 8(7.62,2.54)
  silkscreen extent -1.47,-1.43 9.02,3.97, body extent -1.3,-1.3 8.86,3.78, height 8.5
"Header M 2x8x2.54 TH V" [mm] "2x8x2.54 Header TH V Male"
  rect 1.8x1.8 hole 1: 1(0,0)
  round 1.8 hole 1: 2(0,2.54) 3(2.54,0) 4(2.54,2.54) 5(5.08,0) 6(5.08,2.54) 7(7.62,0) 8(7.62,2.54) 9(10.16,0) 10(10.16,2.54) 11(12.7,0) 12(12.7,2.54) 13(15.24,0) 14(15.24,2.54) 15(17.78,0) 16(17.78,2.54)
  silkscreen extent -1.47,-1.43 19.15,3.97, body extent -1.32,-1.27 19,3.81, height 8.5
"Header M 2x19x2.54 TH M_top + M_bottom" [mm] "2x19x2.54 Header TH V MaleTop + MaleBottom (Morphos_Nucleo64)"
  rect 1.8x1.8 hole 1: 1(0,0)
  round 1.8 hole 1: 2(0,2.54) 3(2.54,0) 4(2.54,2.54) 5(5.08,0) 6(5.08,2.54) 7(7.62,0) 8(7.62,2.54) 9(10.16,0) 10(10.16,2.54) 11(12.7,0) 12(12.7,2.54) 13(15.24,0) 14(15.24,2.54) 15(17.78,0) 16(17.78,2.54) 17(20.32,0) 18(20.32,2.54) 19(22.86,0) 20(22.86,2.54) 21(25.4,0.127) 22(25.4,2.667) 23(27.94,0.127) 24(27.94,2.667) 25(30.48,0.127) 26(30.48,2.667) 27(33.02,0.127) 28(33.02,2.667) 29(35.56,0.127) 30(35.56,2.667) 31(38.1,0) 32(38.1,2.54) 33(40.64,0) 34(40.64,2.54) 35(43.18,0) 36(43.18,2.54) 37(45.72,0) 38(45.72,2.54)
  silkscreen extent -1.47,-1.43 47.24,3.97, body extent -1.32,-1.24 46.94,3.84, height 8.38
"Header NF 1x2x2.54 TH" [mm] "1x2x2.54 Header TH Not Fitted"
  rect 1.8x1.8 hole 1: 1(0,0)
  round 1.8 hole 1: 2(2.54,0)
  silkscreen extent -1.4,-1.4 3.94,1.4
"Header NF 1x5x2.54 TH" [mm] "1x5x2.54 Header TH Not Fitted"
  rect 1.8x1.8 hole 1: 1(0,0)
  round 1.8 hole 1: 2(2.54,0) 3(5.08,0) 4(7.62,0) 5(10.16,0)
  silkscreen extent -1.4,-1.4 11.56,1.4
"Header NF 1x6x2.54 TH" [mm] "1x6x2.54 Header TH Not Fitted"
  rect 1.8x1.8 hole 1: 1(0,0)
  round 1.8 hole 1: 2(2.54,0) 3(5.08,0) 4(7.62,0) 5(10.16,0) 6(12.7,0)
  silkscreen extent -1.4,-1.4 14.1,1.4
HSMF-A201 [mm] "LED"
  rect 1.5x1.1 smd: 1(-1.5,0.75) 2(1.5,0.75) 3(1.5,-0.75) 4(-1.5,-0.75)
  silkscreen extent -2.3,-1.55 1.75,1.93, body extent -1.6,-1.4 1.6,1.4, height 1.3
"Jumper 2.54mm BLACK" [mm] "Jumper 2.54mm Black"
  body extent -2.5,-1.2 2.5,1.2, height 8.5
LFB182G45CGFD436 [mm] "Band Pass Filter Murata LFB182G45CGFD436"
  rect 0.28x0.55 smd mask-0.01: 1(-0.56,0) 3(0.56,0)
  rect 0.4x0.6 smd mask-0.01: 2(0,0)
  silkscreen extent -0.8,-0.4 0.8,0.4, body extent -0.79,-0.39 0.8,0.39, height 0.66
"LOGO CE" [mm]
  silkscreen extent -3.27,-3.31 4.33,3.3
"LOGO ESD" [mm]
  silkscreen extent -3.23,-2.59 3.66,3.68
LOGO_Nucleo [mm] "LOGO_Nucleo Top Overlay"
  silkscreen extent -2.41,-3.86 2.77,1.98
LOGO_Nucleo_www [mm] "Web Link for STM32 Nucleo Board"
LOGO_ST_Size3 [mm]
  silkscreen extent -4.5,-2.36 4.7,2.57
LOGO_StickerArea_Border [mm] "Sticker Area reservation 22x6 mm Border only"
  silkscreen extent 0,0 22,6
LOGO_STM32 [mm]
  silkscreen extent -3.9,-4.23 4.33,3.95
LQFP48_7X7_P050 [mm]
  rect 0.3x1.2 smd mask+0.05: 1(-2.75,-4.25) 2(-2.25,-4.25) 3(-1.75,-4.25) 4(-1.25,-4.25) 5(-0.75,-4.25) 6(-0.25,-4.25) 7(0.25,-4.25) 8(0.75,-4.25) 9(1.25,-4.25) 10(1.75,-4.25) 11(2.25,-4.25) 12(2.75,-4.25) 25(2.75,4.25) 26(2.25,4.25) 27(1.75,4.25) 28(1.25,4.25) 29(0.75,4.25) 30(0.25,4.25) 31(-0.25,4.25) 32(-0.75,4.25) 33(-1.25,4.25) 34(-1.75,4.25) 35(-2.25,4.25) 36(-2.75,4.25)
  rect 1.2x0.3 smd mask+0.05: 13(4.25,-2.75) 14(4.25,-2.25) 15(4.25,-1.75) 16(4.25,-1.25) 17(4.25,-0.75) 18(4.25,-0.25) 19(4.25,0.25) 20(4.25,0.75) 21(4.25,1.25) 22(4.25,1.75) 23(4.25,2.25) 24(4.25,2.75) 37(-4.25,2.75) 38(-4.25,2.25) 39(-4.25,1.75) 40(-4.25,1.25) 41(-4.25,0.75) 42(-4.25,0.25) 43(-4.25,-0.25) 44(-4.25,-0.75) 45(-4.25,-1.25) 46(-4.25,-1.75) 47(-4.25,-2.25) 48(-4.25,-2.75)
  silkscreen extent -4.52,-4.53 3.52,3.52, body extent -4.5,-4.5 4.5,4.5, height 1.6
NX2012_2P [mm]
  rect 1x1.25 smd: 1(0,0) 2(1.5,0)
  silkscreen extent 0.63,-0.76 0.89,0.76, body extent -0.33,-0.76 1.88,0.76, height 0.75
NX2016_4P [mm]
  rect 0.85x0.75 smd: 1(-0.675,-0.525) 2(0.675,-0.525) 3(0.675,0.525) 4(-0.675,0.525)
  silkscreen extent -1.07,-1.16 1.02,0.81, body extent -1,-0.8 1,0.8, height 0.7
SB-tiny [mil]
  round 10 smd paste-10 mask+0.04: 1(-19.69,0)
  round 10 smd paste-10.08 mask+0.04: 2(20,0)
  L1 region: -5.91,19.69 13.78,0 -5.91,-19.68 25,-19.68 25,19.69
  L1 region: -30,-19.68 -30,19.69 -15.75,19.69 3.94,0 -15.75,-19.68
  silkscreen extent -32,-23 27,23
"Shield 17.2x17.2x3" [mm] "Metallic Shield 17.2x17.2mm height =3mm tickness=0.2mm"
  silkscreen extent 17.81,28.6 35.08,45.75, body extent 17.84,28.6 35.04,45.8, height 3
"Shield Clip_A 3.9x1.1x1.28" [mm] "Shield Clip 3.9x1.1x1.28 - Harwin S0951-46R - Full pad"
  rect 0.48x0.5 smd mask+0.075: 1(-1.81,0) 1(1.81,0)
  rect 0.7x0.5 smd mask+0.075: 1(-1.1,0) 1(1.1,0)
  rect 1.1x1.2 smd mask+0.075: 1(0,0)
  body extent -1.95,-0.55 1.95,0.55, height 1.28
SMA_T_9.52_NF [mm]
  rect 2.5x0.5 smd: 1(-2.413,0)
  rect 4.9x1.2 smd: 2(-3.556,-4.25) 2(-3.556,4.25)
  rect 4.9x1.2 smd far side: 2(-3.556,-4.25) 2(-3.556,4.25)
SOD523 [mm]
  rect 0.65x0.3 smd mask+0.05: A(-0.675,0) K(0.675,0)
  silkscreen extent -0.81,-0.41 0.91,0.41, body extent -0.81,-0.41 0.81,0.41, height 0.62
SOD-323 [mm] "Diode"
  rect 1.35x0.4 smd: 1(-1.2,0) 2(1.2,0)
  silkscreen extent -1.4,-0.75 1.94,0.75, body extent -1.35,-0.72 1.35,0.72, height 1.17
SOT23-3 [mm]
  rect 0.9x0.95 smd: 1(-0.95,-2.35) 2(0.95,-2.35) 3(0,0)
  silkscreen extent -1.9,-3.35 1.3,0, body extent -1.46,-2.42 1.46,0.06, height 1.1
SOT23-5 [mil]
  rect 50x20 smd: 1(-50,37.5) 2(-50,0.5) 3(-50,-37.5) 4(50,-37.5) 5(50,37.5)
  silkscreen extent -104,-8 55,77, body extent -55,-57 55,57, height 57
SOT23-6 [mm]
  rect 1.27x0.508 smd: 1(0,0) 2(0,-0.95) 3(0,-1.9) 4(2.3,-1.9) 5(2.3,-0.95) 6(2.3,0)
  silkscreen extent -1.37,0.13 -0.51,1, body extent -0.02,-2.39 2.32,0.53, height 1
SOT223_SC73_A [mm]
  rect 1.5x1.65 smd mask+0.05: 1(-2.3,-3.175) 2(0,-3.175) 3(2.3,-3.175)
  rect 3.5x1.65 smd mask+0.05: 2(0,3.175)
  silkscreen extent -3.35,-2.15 3.35,2.12, body extent -3.35,-3.48 3.35,3.48, height 1.8
SOT353-1 [mm] "SOT353-1 5 pins package"
  rect 0.8x0.37 smd mask+0.075: 1(-0.076,0) 2(-0.076,-0.65) 3(-0.076,-1.3) 4(1.951,-1.3) 5(1.951,0)
  silkscreen extent -0.38,-1.7 1.91,0.51, body extent -0.31,-1.73 2.09,0.47, height 1.1
Sticker_BrdRef_21x5mm [mm] "Sticker_BrdRef_21x5mm White"
  silkscreen extent 0,0 21,5, body extent 0,0 21,5, height 0.1
"Sticker_CPN_FG 16x5mm" [mm] "Sticker_CPN_FG 16x6mm White"
  silkscreen extent 0,0 16,5, body extent 0,0 16,5, height 0.1
"Sticker_FCC_ID 16x5mm" [mm] "Sticker_FCC_ID 16x5mm White"
  silkscreen extent 0,0 16,5, body extent 0,0 16,5, height 3.1
"SW-PB SMD KMR2" [mm]
  rect 0.9x1 smd: 1(-2.05,0.8) 1(2.05,0.8) 2(-2.05,-0.8) 2(2.05,-0.8)
  silkscreen extent -2.4,-1.52 2.42,1.53, body extent -2.41,-1.52 2.41,1.52, height 2.52
SYMBOL_RoHS [mm]
  silkscreen extent 0,0 9.5,6
TSSOP20 [mm]
  rect 1.55x0.25 smd: 1(0,0)
  oval 1.55x0.25 smd: 2(0,-0.65) 3(0,-1.3) 4(0,-1.95) 5(0,-2.6) 6(0,-3.25) 7(0,-3.9) 8(0,-4.55) 9(0,-5.2) 10(0,-5.85) 11(5.6,-5.85) 12(5.6,-5.2) 13(5.6,-4.55) 14(5.6,-3.9) 15(5.6,-3.25) 16(5.6,-2.6) 17(5.6,-1.95) 18(5.6,-1.3) 19(5.6,-0.65) 20(5.6,0)
  silkscreen extent -0.77,-6.27 5.64,0.61, body extent -0.43,-6.17 5.97,0.33, height 1.2
USBMICROB_MOLEX_105017-0001_H2P90 [mm]
  rect 0.4x1.35 smd mask+0.05: 1(-1.3,4.15) 2(-0.65,4.15) 3(0,4.15) 4(0.65,4.15) 5(1.3,4.15)
  oval 1.2x1.9 hole 0.6 slot 1.3 at 90 deg mask+0.05: 6(-3.5,1.45) 6(3.5,1.45)
  round 1.5 hole 0.9 mask+0.05: 6(-2.5,4.15) 6(2.5,4.15)
  rect 1.5x1.9 smd mask+0.05: 6(-1,1.45) 6(1,1.45)
  L1 region: -3.5,2.4 -2.3,2.4 -2.3,0.5 -3.5,0.5
  L1 region: 2.3,2.4 3.5,2.4 3.5,0.5 2.3,0.5
  silkscreen extent -4.45,0 4.45,5.3, body extent -4.1,-1.15 4.1,4.66, height 2.9
VFQFPN68_8x8x0.1_p0.4 [mm]
  oct 1x0.25 smd mask+0.04: 1(-3.878,3.2) 2(-3.878,2.8) 3(-3.878,2.4) 4(-3.878,2) 5(-3.878,1.6) 6(-3.878,1.2) 7(-3.878,0.8) 8(-3.878,0.4) 9(-3.878,0) 10(-3.878,-0.4) 11(-3.878,-0.8) 12(-3.878,-1.2) 13(-3.878,-1.6) 14(-3.878,-2) 15(-3.878,-2.4) 16(-3.878,-2.8) 17(-3.878,-3.2) 35(3.903,-3.2) 36(3.903,-2.8) 37(3.903,-2.4) 38(3.903,-2) 39(3.903,-1.6) 40(3.903,-1.2) 41(3.903,-0.8) 42(3.903,-0.4) 43(3.903,0) 44(3.903,0.4) 45(3.903,0.8) 46(3.903,1.2) 47(3.903,1.6) 48(3.903,2) 49(3.903,2.4) 50(3.903,2.8) 51(3.903,3.2)
  oct 0.25x1 smd mask+0.04: 18(-3.2,-3.903) 19(-2.8,-3.903) 20(-2.4,-3.903) 21(-2,-3.903) 22(-1.6,-3.903) 23(-1.2,-3.903) 24(-0.8,-3.903) 25(-0.4,-3.903) 26(0,-3.903) 27(0.4,-3.903) 28(0.8,-3.903) 29(1.2,-3.903) 30(1.6,-3.903) 31(2,-3.903) 32(2.4,-3.903) 33(2.8,-3.903) 34(3.2,-3.903) 52(3.2,3.903) 53(2.8,3.903) 54(2.4,3.903) 55(2,3.903) 56(1.6,3.903) 57(1.2,3.903) 58(0.8,3.903) 59(0.4,3.903) 60(0,3.903) 61(-0.4,3.903) 62(-0.8,3.903) 63(-1.2,3.903) 64(-1.6,3.903) 65(-2,3.903) 66(-2.4,3.903) 67(-2.8,3.903) 68(-3.2,3.903)
  rect 6.5x6.5 smd paste-5 mask-0.01: 69(0,0)
  silkscreen extent -5.14,-4 4,5.07, body extent -4.01,-3.99 3.99,3.99, height 1.2
X3225 [mm]
  rect 1.4x1.15 smd paste-2 mask-2: 1(-1.1,-0.8) 2(1.1,-0.8) 4(-1.1,0.8)
  rect 1.4x1.15 smd paste-1 mask-1: 3(1.1,0.8)
  silkscreen extent -1.7,-1.3 1.7,1.3, body extent -1.6,-1.24 1.6,1.26, height 0.61

## Part data
C1 C2 C3 C4 C5 C6 C7 C8 C12 C13 C14 C15 C16 C17 C18 C19 C20 C21 C22 C23 C24 C25 C26 C27 C28 C29 C31 C32 C33 C34 C35 C36 C37 C38 C39 C40 C41 C42 C43 C44 C45 C46 C47 C48 C49 C50: library part CAP_NPOL, "Capacitor_not polarized"
C9 C10 C11: library part CAP_POL, "Condensateur_polarise"
CN1 CN15: "USB-MICRO-B, 1050170001, SMT, MOLEX"
CN6 CN9: library part HEADER_1X8
CN7 CN10: library part HEADER_2X19
D1: library part BAT54K, "Schottky Diode"
D2: library part Diode, "Default Diode"
FLT1: "Band Pass Filter Murata LFB182G45CGFD436"
JP2 JP3 JP4 JP6: library part HEADER_1X2_L
L1: library part IND_74479777310A, "Coil Wurtz 10uH ref: 74479777310A"
L2: library part IND_FCM1608KF-601T03
L3 L4 L5: library part INDUCTOR_SMD_STDL
LED1 LED2 LED3 LED4 LED5: library part LED, "Light-Emitting Diode"
LED6: library part LD_BICOLOR_CMS, "Bicolor Led"
Q1: "2N2222_SOT23"
R1 R2 R3 R4 R5 R6 R7 R8 R9 R10 R11 R12 R14 R15 R16 R17 R18 R19 R20 R21 R22 R23 R24 R25 R26 R27 R28 R29 R30 R31 R32 R33: library part RES, "Resistor"
SB1 SB2 SB3 SB4 SB5 SB6 SB7 SB8 SB9 SB10 SB11 SB12 SB13 SB14 SB15 SB16 SB17 SB18 SB22 SB23 SB24 SB25 SB26 SB27 SB28 SB29 SB30 SB31 SB32 SB33 SB34 SB35 SB36 SB37 SB38 SB39 SB40 SB41 SB42 SB43 SB44 SB45 SB46 SB47 SB48 SB49 SB50 SB51: library part Strap2, "Solder Jumper"
SC1 SC2 SC3 SC4: "Harwin S0951-46R"
SH1: library part Shield, "Shield"
STICKER_1: library part LOGO_Sticker_FCC_ID, "Sticker for FCC_ID 16x5mm"
STICKER_2: library part LOGO_Sticker_BrdRef, "Sticker_BrdRef 21x5mm"
STICKER_3: library part LOGO_Sticker_CPN_FG, "Sticker for CPN_FG 16x5mm"
SW1 SW2 SW3 SW4: library part SW-PB_1, "Push-button SMD"
U2: "IC REG LDO 5V 0.8A SOT223"
U3: "3.3V voltage regulator 500mA"
U4: "Enhanced single channel power switches"
U5: "3.3V low drop voltage regulator"
U6 U9: library part USBLC6-2
U7: "TXS0108E Bi-directional Level Shifter TSSOP20"
U8: "Medium-density performance line ARM-based 32-bit MCU with 128KB Flash"
X1: "Crystal NDK 2.0x1.6mm  32 MHz"
X2: "Crystal NDK 2.0x1.2mm  32.768 KHz"
X3: library part X3225, "Crystal 8MHz"

## Free pads (board coordinates)
  round 0.4 hole 0.3: 2(17.124,1.163) 3(22.655,1.163) 4(28.212,1.181) 5(28.212,1.181) 6(42.738,7.684) 7(36.649,6.653) 8(38.51,5.064) 9(53.505,8.717) 10(53.505,8.297) 11(51.303,6.754) 12(53.3,9.344) 13(53.751,9.347) 14(54.598,16.576) 15(54.877,13.95)
  round 0.3 hole 0.2: 16(52.372,11.445) 17(52.362,11.915) 18(54.429,12.296) 19(50.454,13.279) 21(38.602,7.671) 22(49.477,10.329) 23(14.157,3.363) 24(18.268,3.349) 25(19.535,3.349) 26(29.478,22.894) 27(28.68,18.577) 28(38.019,25.374) 29(38.019,25.374) 30(34.505,12.567) 31(34.311,10.698) 32(35.416,11.407) 33(36.014,11.398) 34(36.907,11.941) 35(33.814,16.645) 36(31.761,14.657) 37(41.842,16.111) 38(41.253,17.115) 39(43.674,17.115) 40(43.665,15.596) 41(50.79,20.098) 42(49.464,14.316) 43(40.065,15.08) 45(40.139,20.466) 46(41.768,20.006) 47(40.05,17.173) 48(40.056,16.1) 49(35.633,20.556) 50(35.61,19.894) 51(35.633,19.262) 52(35.633,18.585) 53(36.479,16.658) 54(50.398,9.517) 55(46.514,20.37) 56(54.174,20.99) 57(54.406,18.743) 58(54.398,17.561) 59(53.716,21.644) 60(47.18,26.465) 61(48.123,26.473) 62(45.254,26.469) 63(44.124,26.477) 64(53.56,30.734) 65(53.56,30.734) 66(22.419,48.776) 67(21.991,48.937) 69(21.391,48.926) 70(23.244,48.739) 71(23.64,48.996) 72(24.042,48.749) 73(24.428,48.985) 74(24.851,48.728) 75(25.21,49.012) 76(25.643,48.739) 77(26.05,48.985) 79(26.441,48.739) 80(26.816,48.99) 81(27.239,48.728) 82(27.689,48.937) 83(28.262,48.835) 85(20.318,44.67) 86(19.88,42.678) 87(19.866,42.196) 89(19.863,40.906) 90(20.277,40.704) 91(20.937,40.547) 92(46.464,22.812) 93(52.166,20.106) 94(15.544,11.429) 95(20.006,46.652) 96(19.997,47.142) 97(29.483,41.309) 99(29.533,42.652) 100(29.534,43.063) 101(29.678,43.448) 102(29.411,43.845) 103(29.698,44.254) 104(29.402,44.656) 105(54.205,44.276) 106(54.225,43.816) 107(18.983,42.514) 108(16.702,43.63) 109(37.844,34.004) 110(30.058,40.815) 111(18.692,49.362) 112(18.681,50.398) 113(18.358,48.315) 114(17.648,47.219) 115(18.608,47.25) 116(28.166,39.644) 117(35.008,35.615) 118(36.254,34.908) 119(30.039,39.083) 120(30.889,39.705) 121(30.951,45.052) 122(30.592,46.046) 124(20.112,43.131) 125(22.518,46.172) 126(23.269,46.196) 127(35.925,49.364) 128(18.464,26.334) 129(34.813,42.126) 130(29.237,30.345) 131(32.301,32.41) 132(62.308,28.747) 133(62.308,28.747) 134(30.49,42.607) 135(20.21,39.106) 136(26.249,39.108) 138(28.786,39.28) 139(22.72,54.855) 140(19.541,54.935) 141(27.98,52.47) 142(27.027,51.622) 143(29.923,50.322) 144(28.946,49.456) 145(34.603,50.003) 146(39.908,51.319) 147(33.099,51.917) 148(34.115,51.891) 149(42.147,51.814) 150(42.878,51.803) 151(43.633,55.306) 152(43.599,53.084) 153(41.596,54.415) 154(41.596,52.902) 155(35.869,56.698) 155(39.794,56.684) 156(37.563,56.55) 156(41.596,56.684) 157(32.576,56.7) 158(33.099,52.528) 158(33.099,53.922) 159(22.848,51.355) 160(26.07,51.42) 161(36.77,56.698) 161(40.695,56.684) 162(33.099,55.315) 163(33.099,54.618) 164(33.099,56.012) 165(33.143,56.674) 166(34.968,56.698) 166(37.54,55.94) 166(38.933,56.017) 166(38.943,56.504) 168(41.596,55.928) 169(41.596,55.171) 170(43.546,56.223) 171(43.536,54.335) 172(41.288,51.549) 173(40.545,51.72) 174(41.578,52.146) 175(41.596,53.659) 176(39.838,51.941) 177(43.608,53.468) 178(43.567,53.932) 179(43.608,54.861) 180(43.515,55.821) 181(43.536,56.595) 182(34.968,55.919) 182(37.54,55.191) 182(38.933,55.238) 183(34.968,53.583) 183(37.54,52.942) 183(38.933,52.902) 184(34.968,55.141) 184(37.54,54.441) 184(38.933,54.46) 185(34.968,54.362) 185(37.54,53.691) 185(38.933,53.681) 186(34.942,52.018) 186(34.968,52.805) 186(37.62,52.145) 187(35.76,50.551) 188(36.861,52.001) 189(33.099,53.225) 190(38.941,52.143) 191(35.991,51.967) 192(52.23,21.133) 193(44.164,20.067) 194(41.793,22.048) 195(43.443,22.029) 196(39.955,23.801) 197(53.21,21.19) 198(50.495,22.236) 199(19.056,15.66) 200(19.056,14.294) 201(19.056,12.929) 202(19.056,11.563) 203(19.056,10.198) 204(19.073,9.213) 205(19.073,8.236) 206(19.073,7.259) 207(19.223,6.257) 208(20.025,5.355) 209(48.167,14.72) 210(46.489,14.599) 211(46.475,15.386) 212(46.418,16.328) 213(7.344,12.685) 214(9.625,13.458) 215(15.178,11.874) 216(13.415,14.665) 217(12.67,13.826) 218(8.437,13.411) 219(8.579,11.95) 220(9.757,11.846) 221(7.325,13.458) 222(13.82,9.461) 223(14.772,10.243) 224(12.444,10.319) 225(13.735,22.565) 226(14.216,29.325) 227(38.027,34.831) 228(40.302,35.528) 229(39.209,47.944) 230(39.605,46.813) 231(39.511,45.738) 232(46.11,46.012) 233(45.243,49.264) 234(46.063,48.444) 235(48.222,48.538) 236(48.193,46.341) 237(49.315,46.323) 238(50.381,46.247) 239(50.381,46.247) 241(49.268,49.198) 242(49.956,48.793) 243(7.107,15.822) 244(8.58,15.807) 245(9.719,15.822) 246(9.704,14.532) 247(7.046,14.426) 248(7.957,14.532) 249(12.072,14.836) 250(12.072,14.836) 251(11.996,15.914) 254(12.107,12.089) 255(40.993,6.108) 256(41.751,6.108) 257(57.145,7.287) 258(57.821,6.847) 259(60.619,7.381) 260(60.698,8.246) 261(60.572,9.614) 262(62.239,9.504) 263(63.009,9.535) 264(62.899,8.262) 265(61.83,7.711) 266(60.478,32.585) 267(60.462,34.786) 268(60.368,36.327) 269(55.903,30.619) 270(54.22,30.211) 271(54.252,31.358) 272(57.585,29.912) 273(57.695,32.239) 274(57.852,34.11) 275(57.821,35.415) 276(56.689,37.978) 277(50.415,31.343) 278(50.415,29.676) 279(51.453,29.707) 280(51.437,31.374) 281(46.296,28.685) 282(47.318,28.733) 283(46.689,29.865) 284(28.997,29.561) 285(23.089,27.455) 286(24.436,27.455) 287(26.163,27.472) 288(27.163,27.496) 289(32.033,23.729) 290(34.759,23.253) 291(29.492,20.608) 292(29.479,19.178) 293(34.36,20.691) 294(34.287,18.312) 295(35.056,19.597) 296(35.099,18.384) 297(35.105,20.536) 298(34.323,19.482) 299(38.033,18.281) 300(38.154,19.948) 301(38.197,17.247) 302(38.153,16.746) 303(60.523,47.925) 304(60.332,48.952) 305(60.369,46.473) 306(57.75,48.057) 307(56.034,49.634) 308(57.875,50.419) 309(57.956,49.194) 310(16.201,43.041) 311(16.837,41.923) 312(18.027,43.293) 313(54.279,22.807) 314(57.797,23.315) 315(42.816,24.211) 316(43.74,24.226) 318(8.328,41.381) 319(9.399,40.104) 320(9.516,41.271) 321(10.433,43.801) 322(11.079,44.344) 323(10.448,45.026) 325(9.324,34.02) 326(9.35,35.067) 327(10.304,34.26) 328(11.617,34.273) 329(9.968,36.4) 330(9.657,36.033) 332(12.197,35.907) 333(12.151,34.86) 334(12.184,34.013) 335(8.377,31.615) 336(9.769,31.59) 337(11.39,31.691) 338(6.63,31.641) 339(6.959,45.339) 340(7.035,45.973) 342(58.981,25.54) 343(59.812,25.524) 344(61.507,25.46) 345(61.531,26.121) 346(62.755,18.958) 347(63.015,17.057) 348(18.239,31.675) 349(18.221,30.475) 350(18.245,28.929) 351(18.319,27.236) 352(18.649,24.894) 353(62.336,52.484) 354(60.253,51.805) 355(12.897,1.299) 356(12.04,2.243) 357(11.225,2.486) 358(9.882,2.486) 359(8.209,2.529) 360(8.009,3.529) 361(6.68,3.572) 362(5.179,3.658) 363(3.636,3.601) 364(2.664,3.543) 365(2.592,2.457) 366(8.818,27.856) 367(2.81,56.535) 368(4.965,56.556) 369(7.037,56.577) 370(9.067,56.577) 371(11.097,56.556) 372(13.315,56.577) 373(15.198,56.514) 374(15.198,56.514) 375(16.873,56.514) 376(18.902,56.514) 377(18.861,55.51) 378(20.409,55.426) 379(21.351,55.468) 380(22.23,55.573) 381(21.192,56.755) 382(23.586,56.761) 383(24.821,56.687) 384(26.349,56.677) 385(23.625,55.447) 386(24.59,55.295) 387(25.53,54.634) 388(26.47,53.72) 389(27.181,53.288) 390(28.273,53.136) 391(29.46,53.166) 392(29.485,54.433) 393(28.478,54.448) 394(27.638,54.533) 395(26.902,55.168) 396(25.86,56.184) 397(27.451,56.652) 398(28.698,56.617) 399(29.73,56.567) 400(30.407,56.532) 401(31.599,56.607) 402(30.686,54.279) 403(32.015,54.458) 404(32.19,53.516) 405(31.92,52.81) 406(32.421,52.048) 407(30.661,52.602) 408(31.372,51.078) 409(32.617,50.57) 410(34.039,50.52) 411(36.654,50.581) 412(37.646,50.591) 413(38.753,50.596) 414(39.434,50.566) 415(39.87,50.821) 416(28.781,52.247) 417(29.238,52.755) 418(29.775,51.337) 419(30.422,52.124) 420(30.915,51.561) 421(27.18,52.399) 422(29.667,49.695) 423(27.952,49.664) 424(27.206,50.541) 425(26.735,50.3) 426(25.472,50.354) 427(23.418,50.333) 429(24.161,50.323) 430(25.007,50.336) 431(21.596,50.149) 432(22.19,50.21) 433(22.239,50.919) 434(22.251,51.598) 435(21.511,51.61) 436(20.76,52.265) 437(20.166,52.762) 438(19.296,52.717) 439(17.937,52.681) 440(16.012,52.646) 441(14.724,52.717) 442(14.653,53.921) 443(14.642,55.138) 444(14.559,56.142) 445(16,55.256) 446(17.11,55.28) 447(18.114,55.327) 448(17.973,53.992) 449(17.973,53.992) 450(16.709,53.969) 451(15.598,53.981) 452(19.13,53.91) 453(20.808,53.862) 454(21.623,54.725) 455(22.213,53.697) 456(23.702,54.477) 457(23.796,54.819) 458(24.824,53.921) 459(25.899,53.732) 460(26.253,52.409) 461(25.048,51.464) 462(23.796,51.417) 463(28.607,55.516) 464(29.974,55.643) 465(31.341,55.643) 466(31.341,55.643) 467(30.86,50.173) 468(30.86,50.173) 469(32.152,50.224) 470(33.367,50.148) 471(44.255,51.997) 472(47.42,52.073) 473(50.079,52.199) 474(45.014,54.225) 475(40.685,50.68) 476(42.634,50.857) 477(69.474,52.984) 478(69.449,50.477) 479(62.57,14.419) 480(63.025,13.327) 481(65.65,13.834) 482(62.297,15.913) 483(63.09,15.796) 484(62.193,12.132) 485(63.051,10.806) 486(60.504,12.249) 487(60.595,13.236) 488(60.582,10.819) 489(62.687,6.635) 490(61.635,5.804) 491(61.946,4.115) 492(62.947,4.478) 493(65.533,5.674) 494(67.937,6.324) 495(67.846,8.87) 496(67.859,11.417) 497(67.742,13.847) 498(67.859,16.485) 499(67.859,19.057) 500(67.69,21.578) 501(65.637,21.461) 502(67.69,24.073) 503(67.625,26.723) 504(65.663,26.529) 505(65.52,28.595) 506(67.846,28.685) 507(65.468,30.712) 508(65.845,34.637) 509(67.69,34.351) 510(68.144,37.612) 511(67.235,36.741) 512(67.885,39.106) 513(65.533,39.249) 514(63.454,39.327) 515(65.611,41.887) 516(63.35,41.874) 517(67.794,41.861) 518(67.768,44.356) 519(67.729,46.915) 520(67.703,49.501) 521(67.794,52.295) 522(65.481,52.243) 523(61.245,53.191) 524(62.856,51.593) 525(64.259,52.685) 526(62.219,54.595) 527(51.617,47.123) 528(51.669,44.538) 529(52.968,47.149) 530(55.06,47.214) 531(53.033,45.954) 532(21.863,43.098) 533(22.777,42.184) 534(24.043,42.248) 535(24.018,41.505) 536(25.921,42.134) 537(25.888,41.475) 538(24.993,41.822) 539(27.043,42.196) 540(27.04,41.486) 541(22.754,43.088) 542(25.149,45.018) 543(25.915,45.044) 544(25.034,46.664) 545(26.133,46.653) 546(22.406,45.025) 547(23.057,45.02) 548(24.073,43.771) 549(24.598,43.14) 550(24.941,43.776) 551(25.442,43.418) 552(25.925,43.793) 553(25.975,43.157) 554(27.036,43.771) 555(27.064,43.14) 556(21.904,41.284) 557(23.968,46.643) 558(25.582,47.061) 559(22.421,42.7) 560(22.435,47.608) 561(27.679,43.682) 562(27.627,43.148) 563(27.731,42.118) 564(27.692,41.453) 565(12.724,54.295) 566(11.329,54.36) 567(10.938,53.669) 568(10.495,52.6) 569(11.773,48.715) 570(12.79,48.702) 571(9.999,48.702) 572(9.986,50.501) 573(13.129,51.179) 574(14.015,52.209) 575(13.454,55.181) 576(14.458,47.476) 577(15.2,46.445) 578(29.996,36.438) 580(28.937,36.434) 581(22.374,32.59)
  round 0.3 hole 0.2 mask-0.01: 585(37.828,35.375)

## Via types
v1: diameter 0.3, hole 0.2, L1 to L4, tented both sides, 254 vias
v2: diameter 0.406, hole 0.203, L1 to L4, tented both sides, 7 vias